# Altium PCB Digit_1.PcbDoc
Units mil, origin at the board's own origin, x right, y up, seen from the top; angles counter-clockwise.
Board outline 5400 x 5500 mil, 4 copper layers (Top Layer, Mid-Layer 1, Mid-Layer 2, Bottom Layer); 153 components, 134 nets, 1717 pads, 104 vias.
Unrouted connection lines stored in the file: 122.
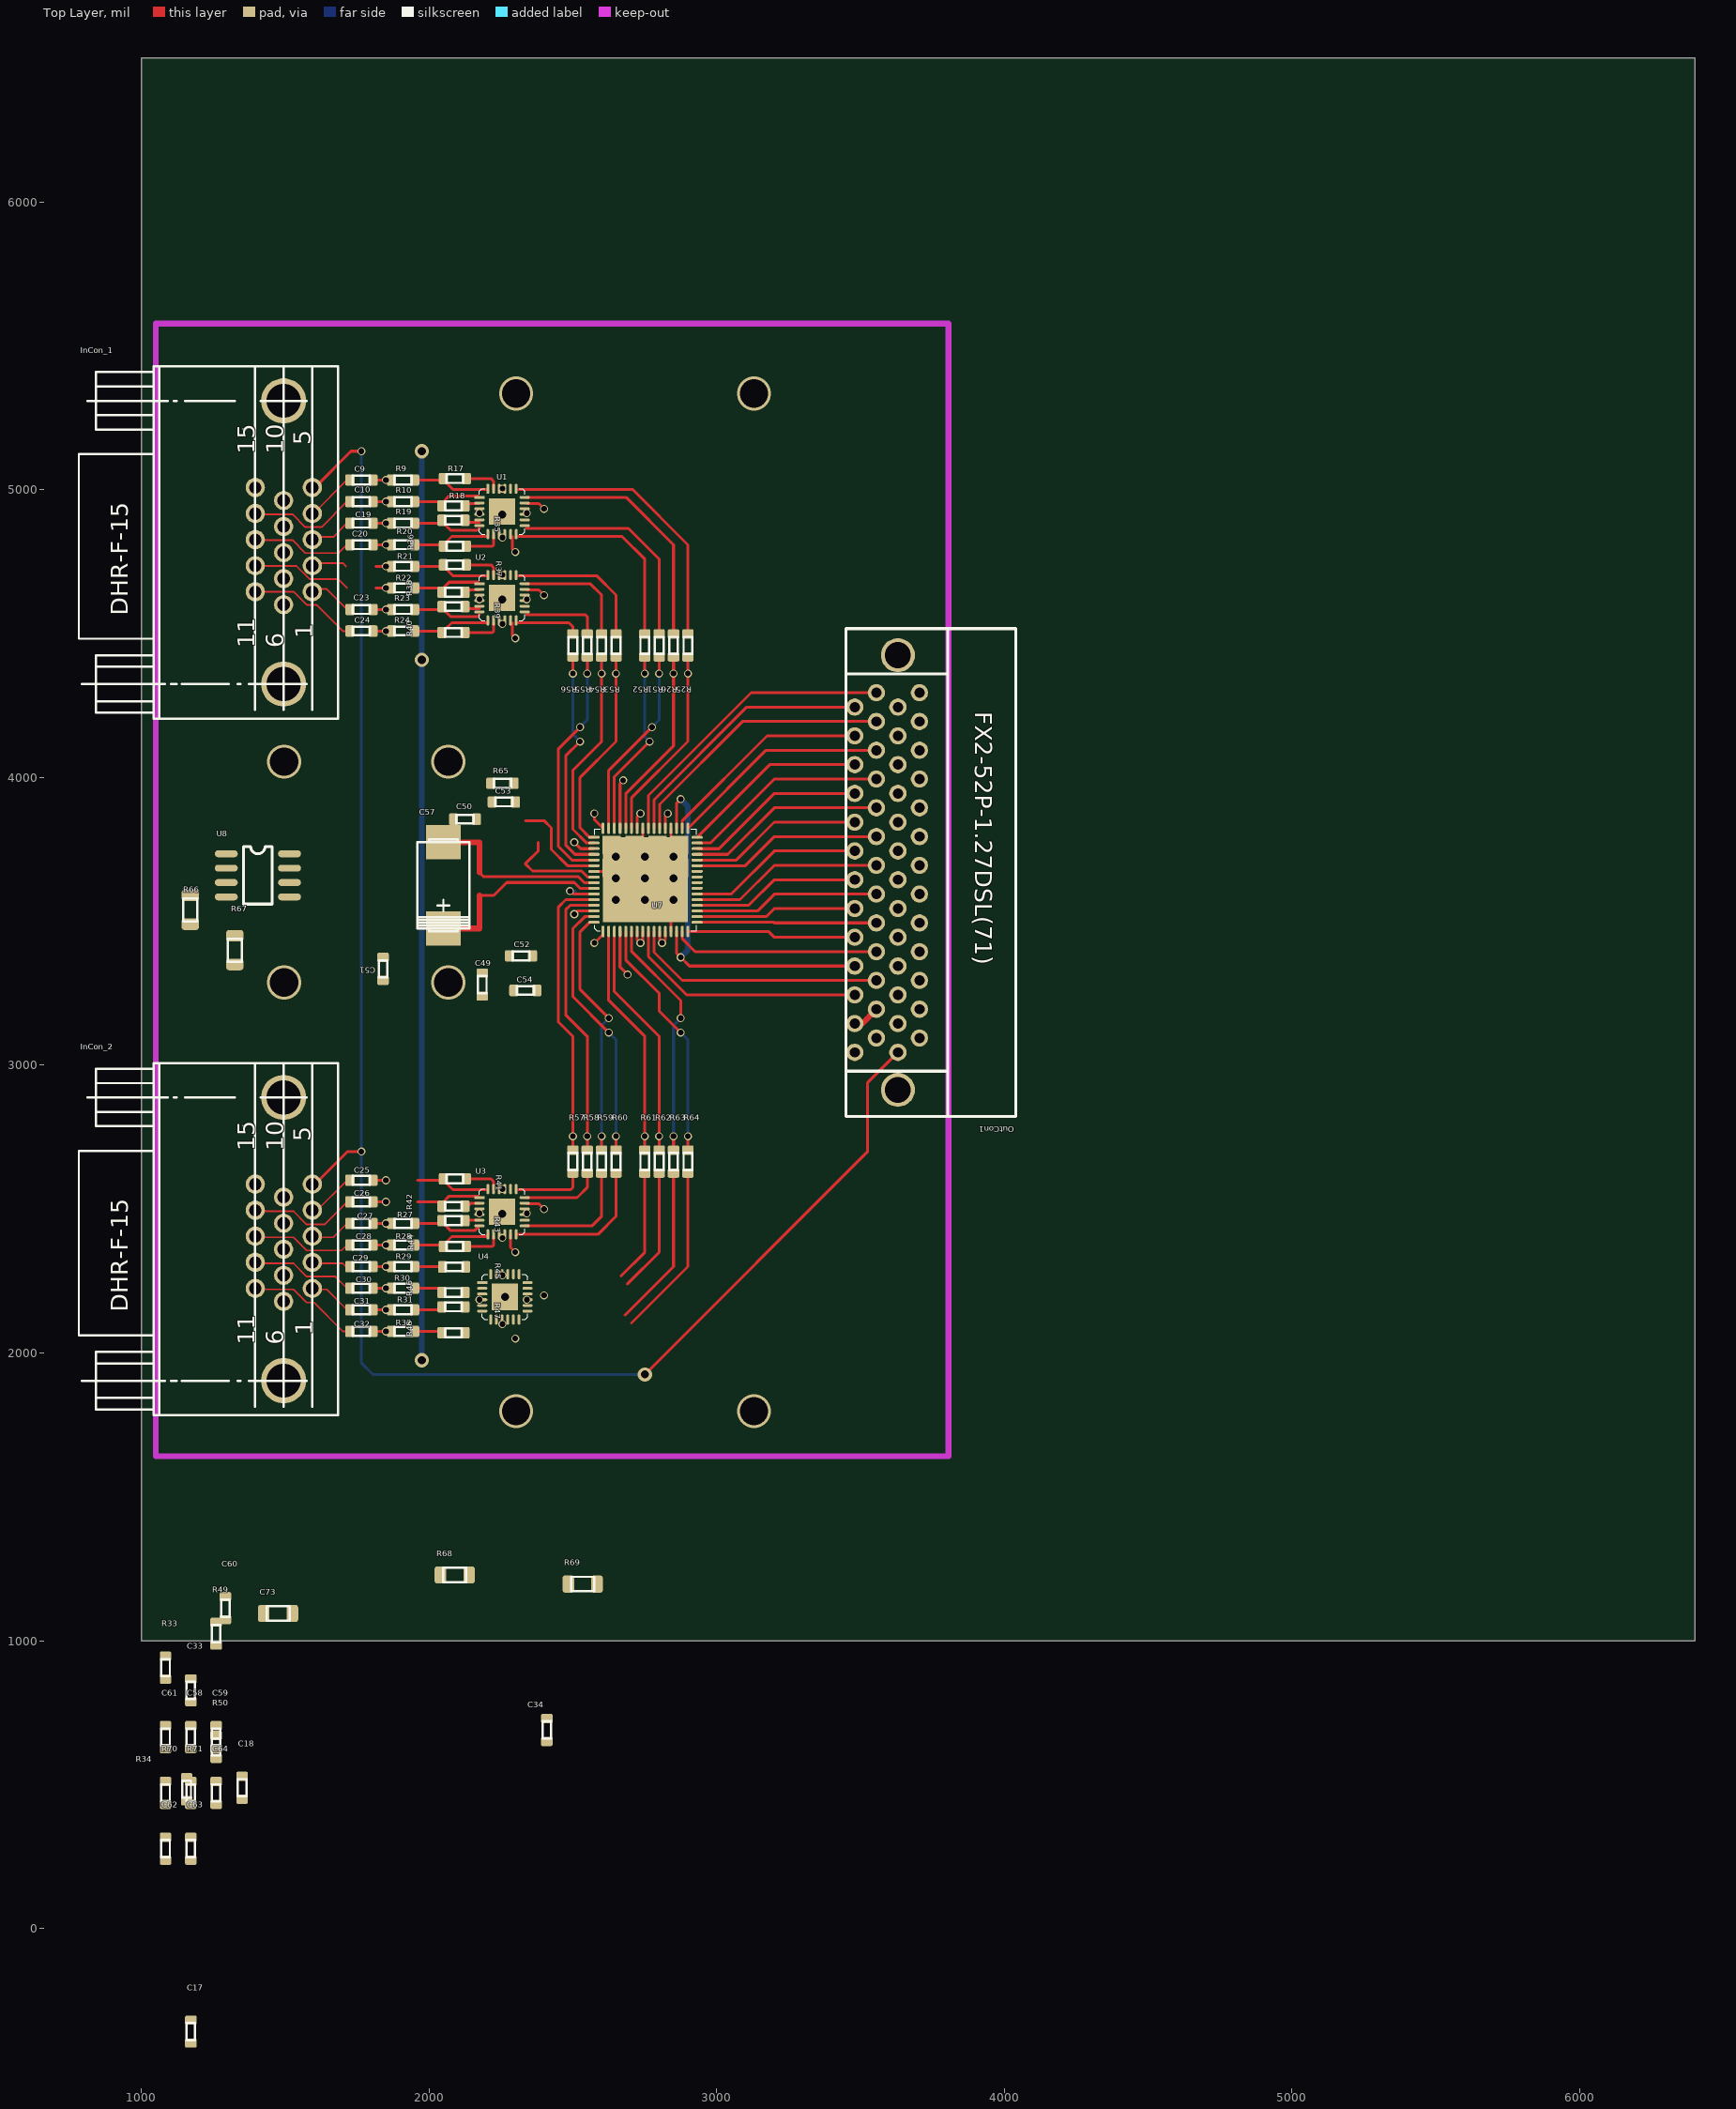
[diagram p0: Top Layer view]
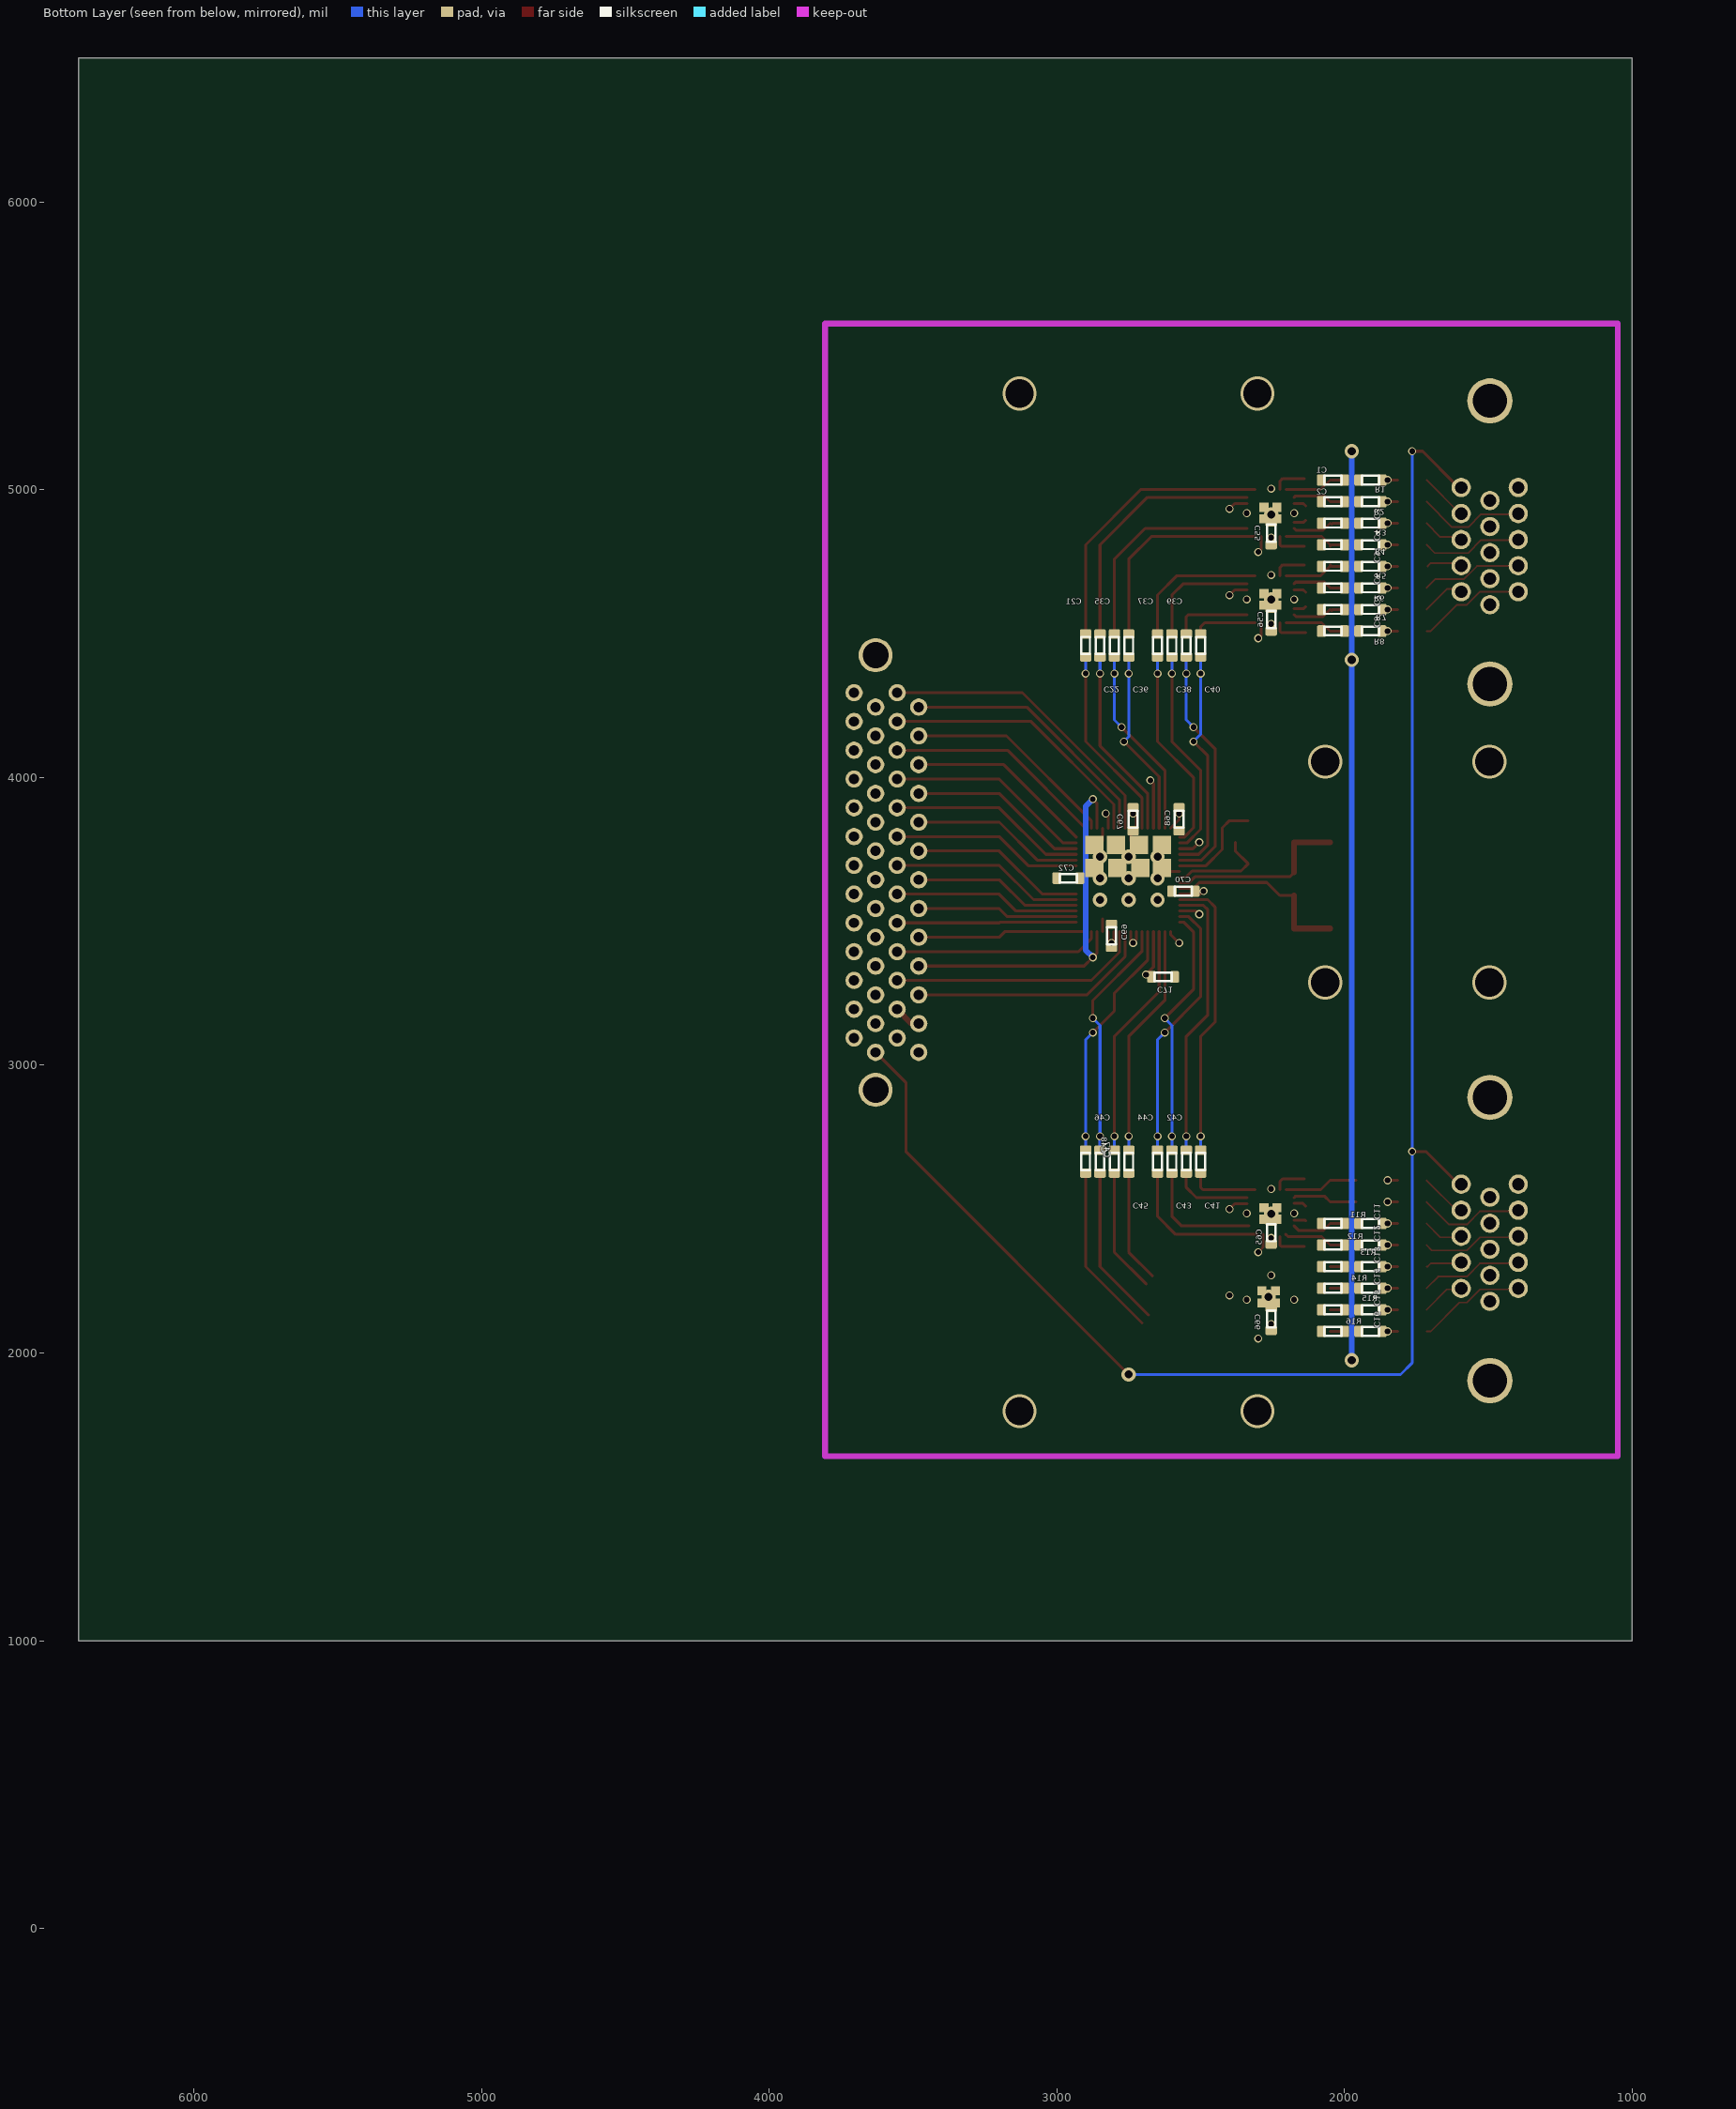
[diagram p1: Bottom Layer view, seen from below]
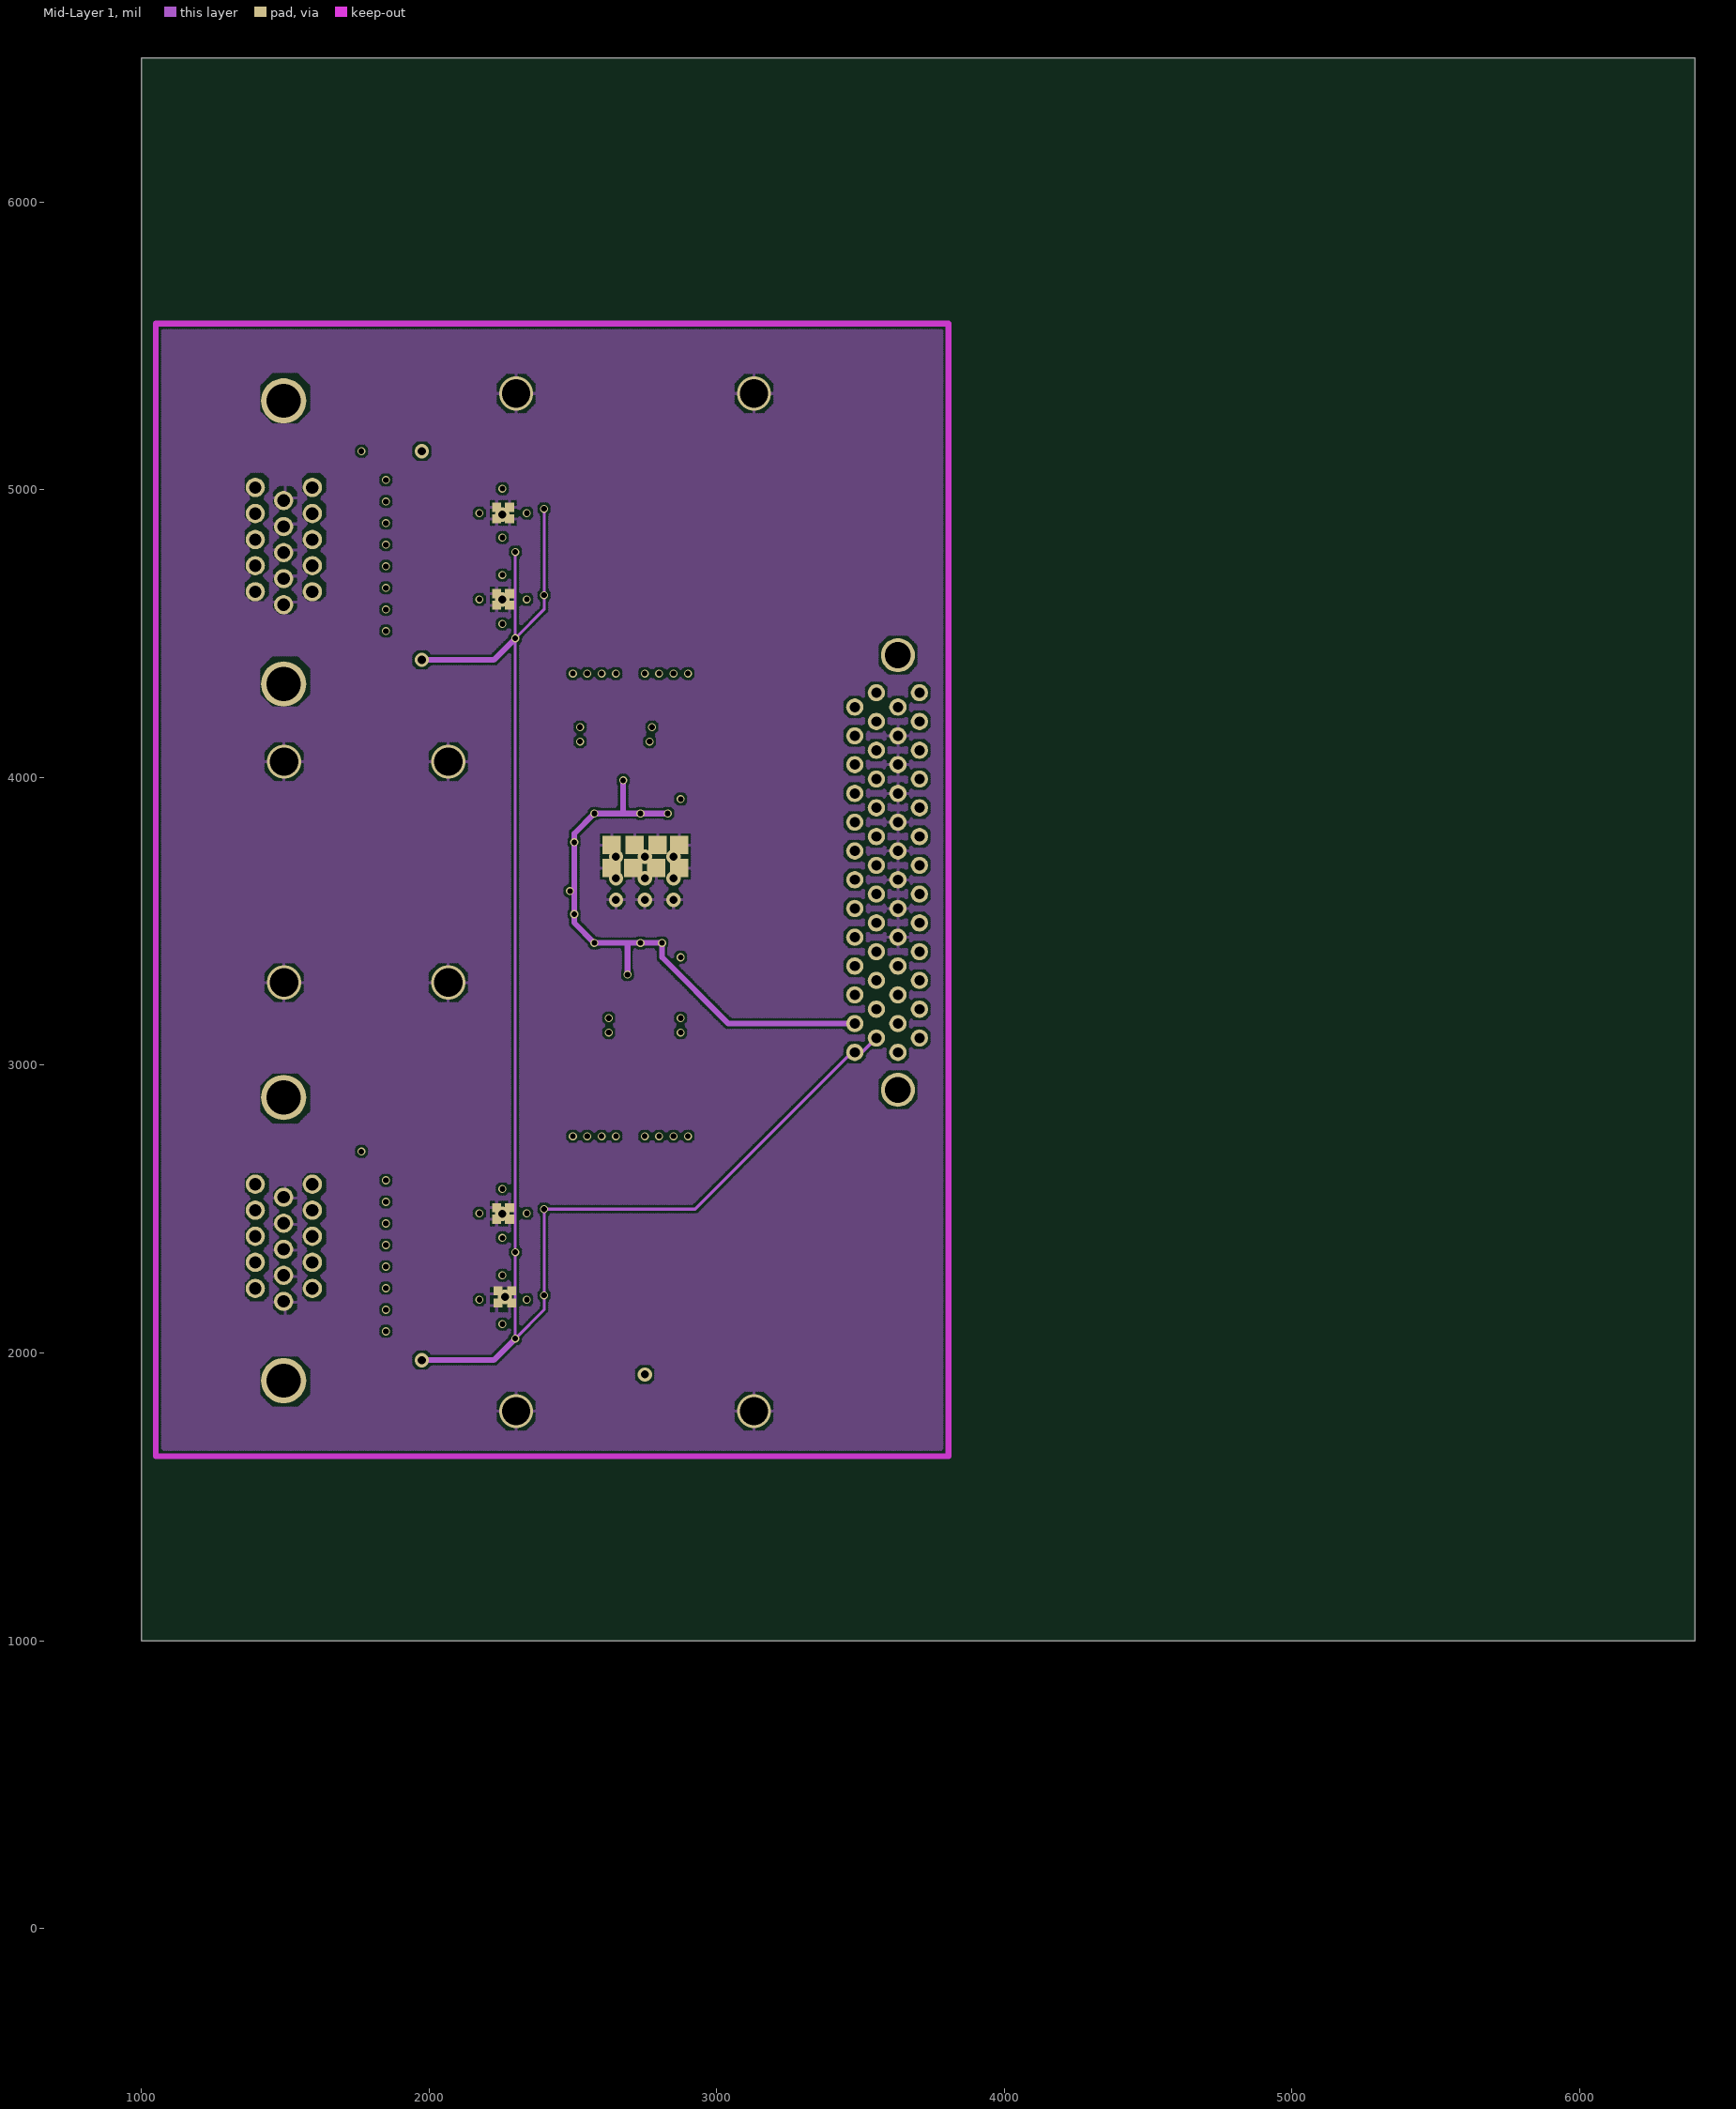
[diagram p2: Mid-Layer 1]
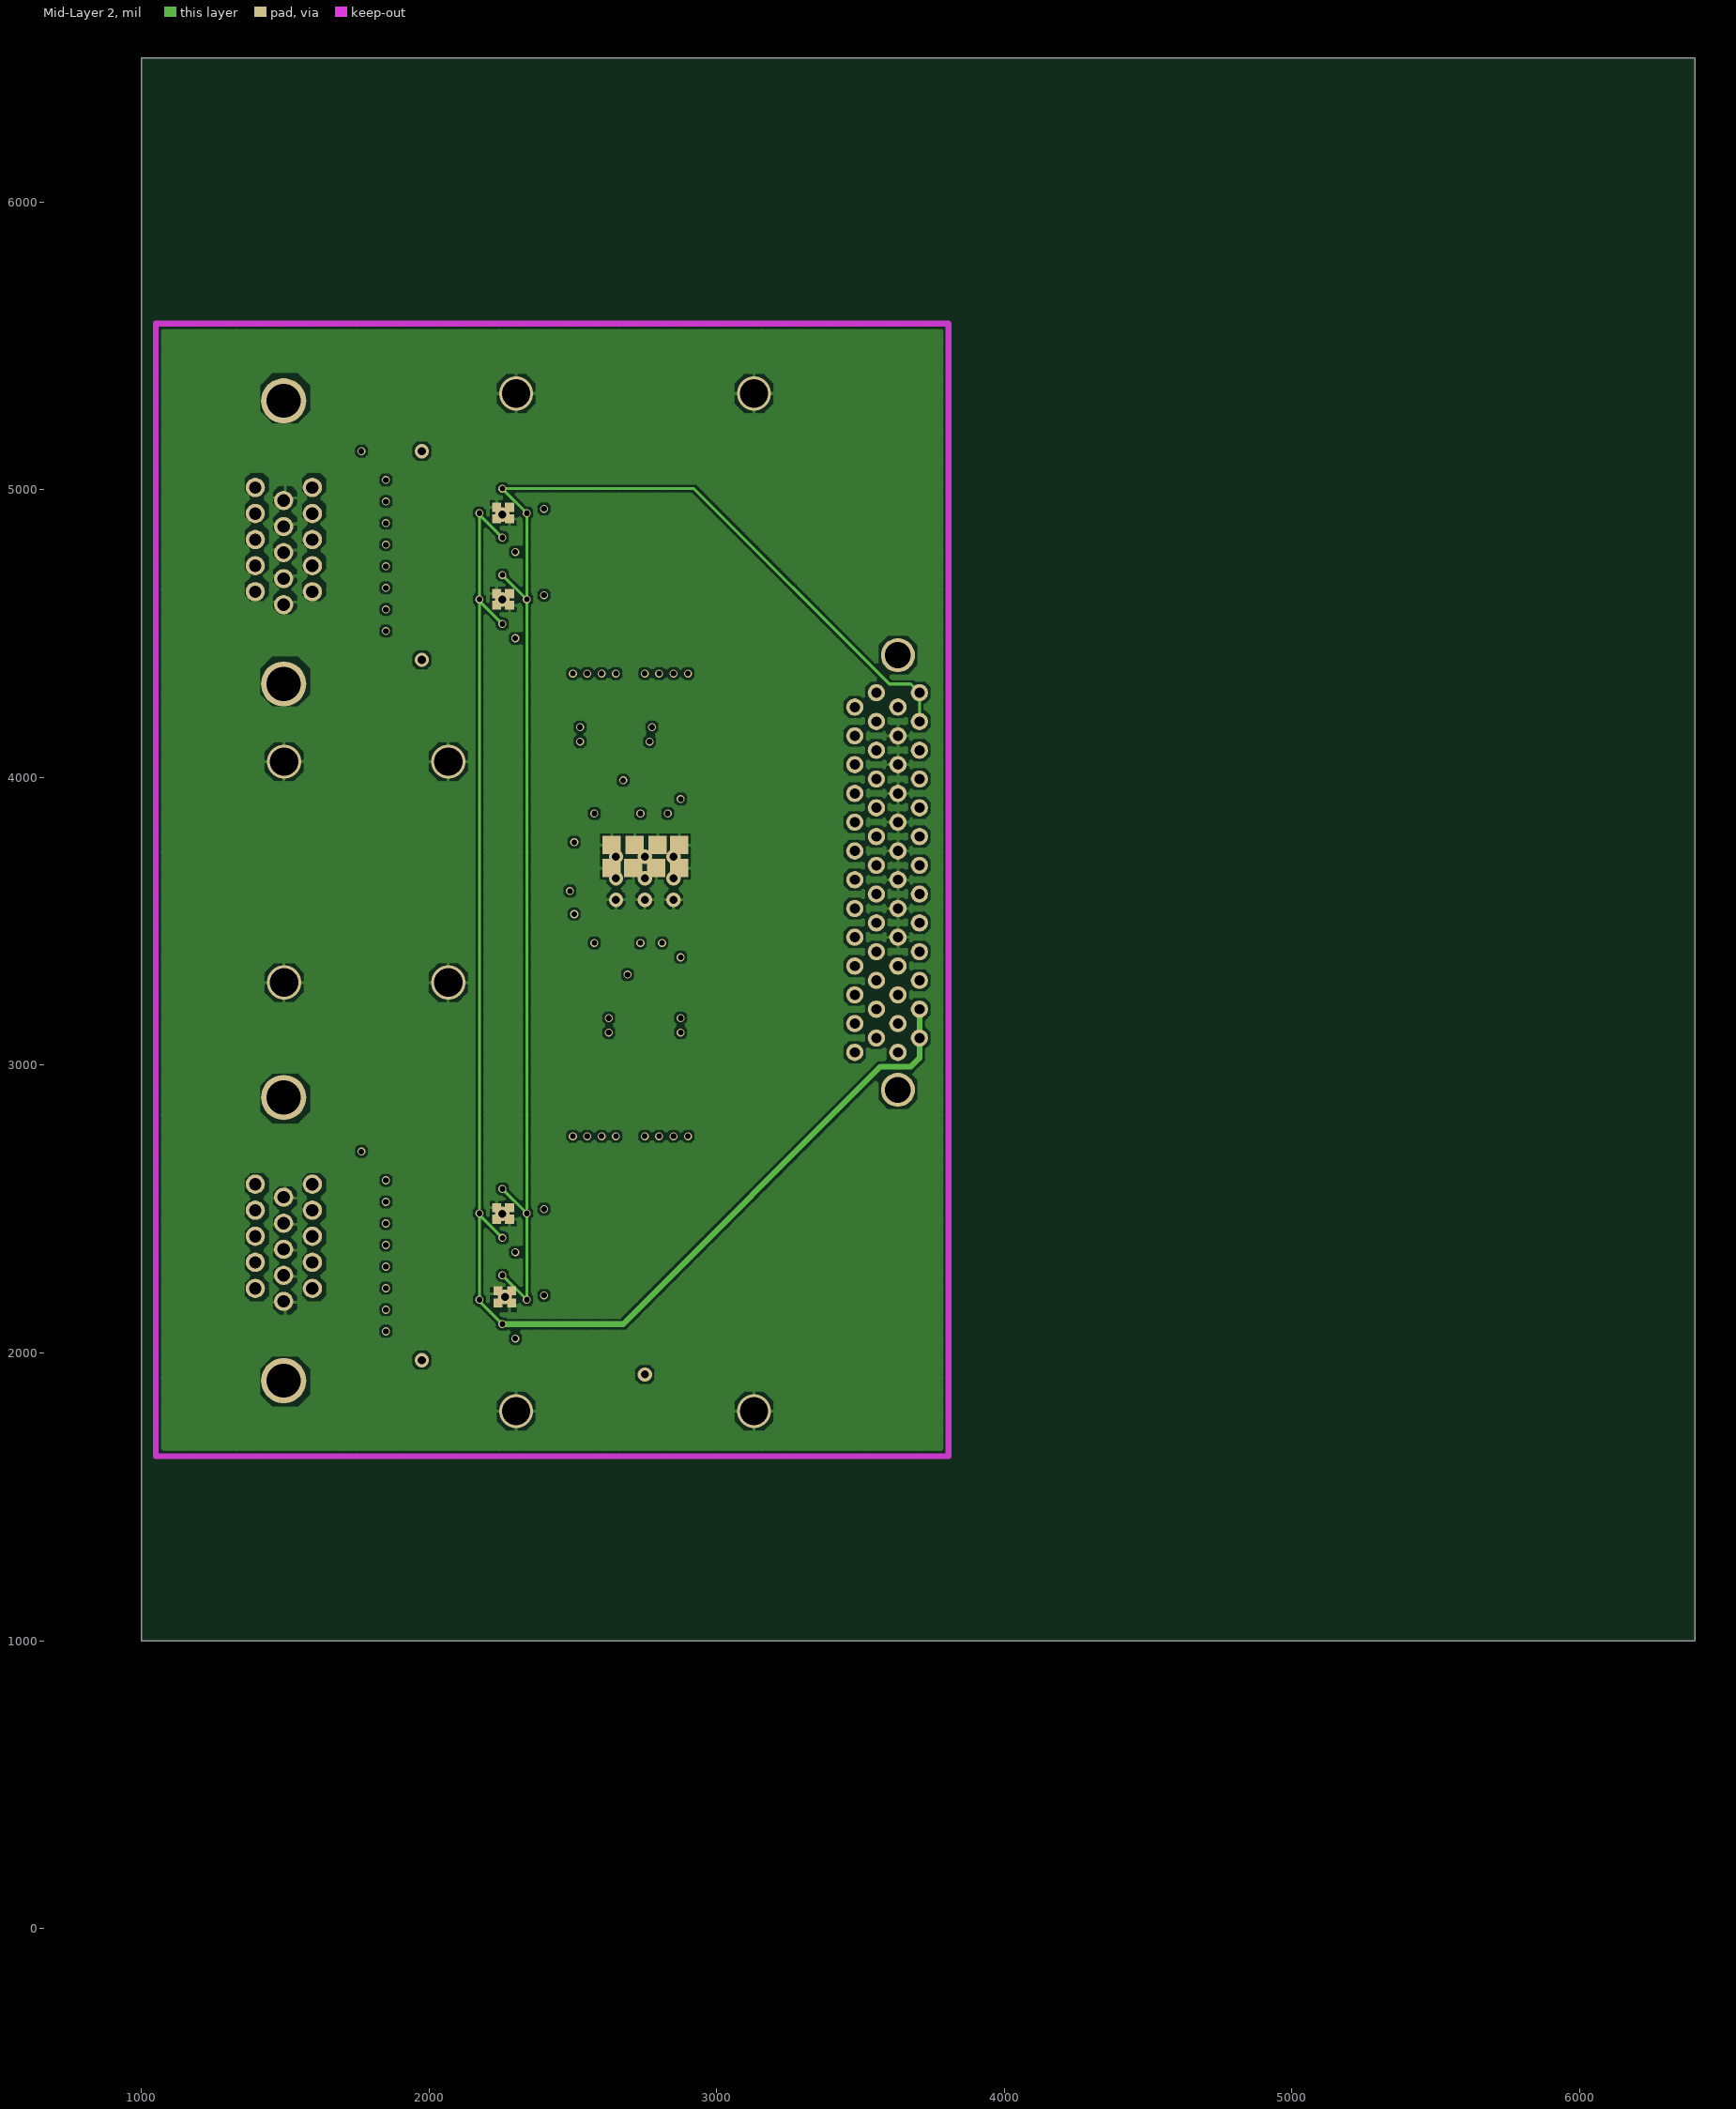
[diagram p3: Mid-Layer 2]

## Layer stack, top to bottom
Top Layer: signal copper 1.4
Dielectric: core 12.6, FR-4, Dk 4.8
Mid-Layer 1: signal copper 1.4
Dielectric: prepreg 12.6, FR-4, Dk 4.8
Mid-Layer 2: signal copper 1.4
Dielectric: core 12.6, FR-4, Dk 4.8
Bottom Layer: signal copper 1.4

## Board outline
1000,1000 1000,6500 6400,6500 6400,1000

## Design rules (kind name [scope] priority, off if disabled: settings)
Clearance [All] p1: gap=8
PolygonConnect [All] p1: connectstyle=Relief reliefconductorwidth=10 reliefentries=4 polygonreliefangle="90 Angle"
RoomDefinition Digitizer [InComponentClass('Digitizer')] p1: confinementstyle=ConfineIn formatcopy=TRUE lockcomponents=FALSE outline 1050,1050 1372.83,1050 1372.83,1246.85 1050,1246.85
RoutingVias [All] p1: holewidth=28 width=50 viastyle="Through Hole" minholewidth=28 minwidth=50 maxholewidth=28 maxwidth=50
SilkscreenOverComponentPads [All] p1: minsilkscreentomaskgap=10
SolderMaskExpansion [All] p1: expansion=4
Width [All] p1: maxlimit=40 minlimit=6 preferedwidth=8
27 further rules are at their usual default settings.

## Classes and differential pairs
component class Digitizer: C1 C2 C3 C4 C5 C6 C7 C8 C9 C10 C11 C12 C13 C14 C15 C16 C17 C18 C19 C20 C21 C22 C23 C24 C25 C26 C27 C28 C29 C30 C31 C32 C33 C34 C35 C36 C37 C38 C39 C40 C41 C42 C43 C44 C45 C46 C47 C48 C49 C50 C51 C52 C53 C54 C55 C56 C65 C66 C67 C68 C69 C70 C71 C72 C73 InCon_1 InCon_2 OutCon1 R1 R2 R3 R4 R5 R6 R7 R8 R9 R10 R11 R12 R13 R14 R15 R16 R17 R18 R19 R20 R21 R22 R23 R24 R25 R26 R27 R28 R29 R30 R31 R32 R33 R34 R35 R36 R37 R38 R39 R40 R41 R42 R43 R44 R45 R46 R47 R48 R49 R50 R51 R52 R53 R54 R55 R56 R57 R58 R59 R60 R61 R62 R63 R64 R65 R66 R67 R68 R69 U1 U2 U3 U4 U6 U7 U8

## Components (designator, comment, footprint, x,y, rotation, side; value= is the part's Value field where it differs from the comment)
C1 "10uF" chip0603 2080,5033.86 r180 bottom
C2 "0.1uF" chip0603 2080,4958.86 r180 bottom
C3 "10uF" chip0603 2080,4883.86 r180 bottom
C4 "0.1uF" chip0603 2080,4808.86 r180 bottom
C5 "10uF" chip0603 2080,4733.86 r180 bottom
C6 "0.1uF" chip0603 2080,4658.86 r180 bottom
C7 "10uF" chip0603 2080,4583.86 r180 bottom
C8 "0.1uF" chip0603 2080,4508.86 r180 bottom
C9 "1uF" chip0603 1725,5033.86 r0 top
C10 "1uF" chip0603 1725,4958.86 r0 top
C11 "1uF" chip0603 2080,2450 r180 bottom
C12 "1uF" chip0603 2080,2375 r180 bottom
C13 "1uF" chip0603 2080,2300 r180 bottom
C14 "1uF" chip0603 2080,2225 r180 bottom
C15 "1uF" chip0603 2080,2150 r180 bottom
C16 "1uF" chip0603 2080,2075 r180 bottom
C17 "1uF" chip0603 1172,-398.78 r90 top
C18 "1uF" chip0603 1350.39,448.82 r90 top
C19 "1uF" chip0603 1725,4883.86 r0 top
C20 "1uF" chip0603 1725,4808.86 r0 top
C21 "56pF" chip0603 2900,4418.86 r90 bottom
C22 "56pF" chip0603 2850,4498.86 r270 bottom
C23 "56pF" chip0603 1725,4583.86 r0 top
C24 "56pF" chip0603 1725,4508.86 r0 top
C25 "56pF" chip0603 1725,2600 r0 top
C26 "56pF" chip0603 1725,2525 r0 top
C27 "56pF" chip0603 1725,2450 r0 top
C28 "56pF" chip0603 1725,2375 r0 top
C29 "10uF" chip0603 1725,2300 r0 top
C30 "0.1uF" chip0603 1725,2225 r0 top
C31 "10uF" chip0603 1725,2150 r0 top
C32 "0.1uF" chip0603 1725,2075 r0 top
C33 "10uF" chip0603 1172,787.4 r90 top
C34 "0.1uF" chip0603 2409.45,649.61 r90 top
C35 "10uF" chip0603 2800,4418.86 r90 bottom
C36 "0.1uF" chip0603 2750,4498.86 r270 bottom
C37 "1uF" chip0603 2650,4418.86 r90 bottom
C38 "1uF" chip0603 2600,4498.86 r270 bottom
C39 "1uF" chip0603 2550,4418.86 r90 bottom
C40 "1uF" chip0603 2500,4498.86 r270 bottom
C41 "1uF" chip0603 2500,2705 r270 bottom
C42 "1uF" chip0603 2550,2625 r90 bottom
C43 "1uF" chip0603 2600,2705 r270 bottom
C44 "1uF" chip0603 2650,2625 r90 bottom
C45 "1uF" chip0603 2750,2705 r270 bottom
C46 "1uF" chip0603 2800,2625 r90 bottom
C47 "1uF" chip0603 2850,2705 r270 bottom
C48 "1uF" chip0603 2900,2625 r90 bottom
C49 "56pF" chip0603 2185,3240 r90 top
C50 "56pF" chip0603 2085,3855 r0 top
C51 "56pF" chip0603 1840,3375 r270 top
C52 "56pF" chip0603 2360,3380 r180 top
C53 "56pF" chip0603 2220,3915 r0 top
C54 "56pF" chip0603 2295,3260 r0 top
C55 "56pF" chip0603 2255,4888.86 r270 bottom
C56 "56pF" chip0603 2255,4588.86 r270 bottom
C57 "4.7uF" CEL-SMD300 2050,3475 r90 top
C58 "0.1uF" chip0603 1172,624.9 r90 top
C59 "0.1uF" chip0603 1260,624.9 r90 top
C60 "0.1uF" chip0603 1292,1072.9 r90 top
C61 "0.1uF" chip0603 1084,624.9 r90 top
C62 "1uF" chip0603 1084,237 r90 top
C63 "0.1uF" chip0603 1172,237 r90 top
C64 "0.1uF" chip0603 1260,430.95 r90 top
C65 "0.1uF" chip0603 2255,2458.15 r270 bottom
C66 "0.1uF" chip0603 2255,2158.15 r270 bottom
C67 "0.1uF" chip0603 2735,3815 r90 bottom
C68 "0.1uF" chip0603 2575,3815 r90 bottom
C69 "0.1uF" chip0603 2810,3490 r270 bottom
C70 "0.1uF" chip0603 2600,3605 r180 bottom
C71 "0.1uF" chip0603 2590.55,3307.09 r0 bottom
C72 "0.1uF" chip0603 3000,3650 r180 bottom
C73 "0.47uF" chip0805 1425.2,1094.49 r0 top
InCon_1 "DHR-15F" DHR-F-15 1494.49,4324.8 r90 top
InCon_2 "DHR-15F" DHR-F-15 1494.49,1903.54 r90 top
OutCon1 "FX2-052P-1.27DSL(71)" FX2-52P-1.27DSL(71) 3630,4425 r270 top
R1 "50" chip0603 1950,5033.86 r180 bottom
R2 "50" chip0603 1870,4958.86 r0 bottom
R3 "50" chip0603 1950,4883.86 r180 bottom
R4 "50" chip0603 1870,4808.86 r0 bottom
R5 "50" chip0603 1950,4733.86 r180 bottom
R6 "50" chip0603 1870,4658.86 r0 bottom
R7 "50" chip0603 1950,4583.86 r180 bottom
R8 "50" chip0603 1870,4508.86 r0 bottom
R9 "510" chip0603 1950,5033.86 r180 top
R10 "510" chip0603 1950,4958.86 r180 top
R11 "510" chip0603 1950,2450 r180 bottom
R12 "510" chip0603 1870,2375 r0 bottom
R13 "510" chip0603 1950,2300 r180 bottom
R14 "510" chip0603 1870,2225 r0 bottom
R15 "510" chip0603 1950,2150 r180 bottom
R16 "510" chip0603 1870,2075 r0 bottom
R17 "510" chip0603 2050,5038.86 r0 top
R18 "510" chip0603 2125,4943.86 r180 top
R19 "510" chip0603 1950,4883.86 r180 top
R20 "510" chip0603 1950,4808.86 r180 top
R21 "510" chip0603 1950,4733.86 r180 top
R22 "510" chip0603 1950,4658.86 r180 top
R23 "510" chip0603 1950,4583.86 r180 top
R24 "510" chip0603 1950,4508.86 r180 top
R25 "100" chip0603 2900,4498.86 r270 top
R26 "100" chip0603 2850,4498.86 r270 top
R27 "100" chip0603 1950,2450 r180 top
R28 "100" chip0603 1950,2375 r180 top
R29 "100" chip0603 1950,2300 r180 top
R30 "100" chip0603 1950,2225 r180 top
R31 "100" chip0603 1950,2150 r180 top
R32 "100" chip0603 1950,2075 r180 top
R33 "50" chip0603 1084,866.14 r90 top
R34 "50" chip0603 1157.48,523.62 r270 top
R35 "50" chip0603 2045,4893.86 r0 top
R36 "50" chip0603 2130,4803.86 r180 top
R37 "50" chip0603 2050,4738.86 r0 top
R38 "50" chip0603 2125,4643.86 r180 top
R39 "50" chip0603 2045,4593.86 r0 top
R40 "50" chip0603 2125,4503.86 r180 top
R41 "510" chip0603 2050,2605 r0 top
R42 "510" chip0603 2125,2510 r180 top
R43 "510" chip0603 2045,2460 r0 top
R44 "510" chip0603 2130,2370 r180 top
R45 "510" chip0603 2047.24,2299.21 r0 top
R46 "510" chip0603 2125,2210 r180 top
R47 "510" chip0603 2045,2160 r0 top
R48 "510" chip0603 2125,2070 r180 top
R49 "510" chip0603 1260,984.25 r90 top
R50 "510" chip0603 1260,590.55 r90 top
R51 "510" chip0603 2800,4498.86 r270 top
R52 "510" chip0603 2750,4498.86 r270 top
R53 "510" chip0603 2650,4498.86 r270 top
R54 "510" chip0603 2600,4498.86 r270 top
R55 "510" chip0603 2550,4498.86 r270 top
R56 "510" chip0603 2500,4498.86 r270 top
R57 "100" chip0603 2500,2625 r90 top
R58 "100" chip0603 2550,2625 r90 top
R59 "100" chip0603 2600,2625 r90 top
R60 "100" chip0603 2650,2625 r90 top
R61 "100" chip0603 2750,2625 r90 top
R62 "100" chip0603 2800,2625 r90 top
R63 "100" chip0603 2850,2625 r90 top
R64 "100" chip0603 2900,2625 r90 top
R65 "10k" chip0603 2295,3980 r180 top
R66 "3k" CHIP0805 1170,3490 r90 top
R67 "2k" CHIP0805 1325,3350 r90 top
R68 "240" CHIP0805 2039.37,1228.35 r0 top
R69 "5k6" CHIP0805 2484.25,1196.85 r0 top
R70 "R" chip0603 1084,430.95 r90 top
R71 "R" chip0603 1172,430.95 r90 top
U1 "AD4932-2" CP-24-13 2175,4973.86 r0 top
U2 "AD4932-2" CP-24-13 2175,4673.86 r0 top
U3 "AD4940-2" CP-24-13 2175,2540 r0 top
U4 "AD4940-2" CP-24-13 2185.04,2244.09 r0 top
U7 "AD9212" CP-64-6 2605,3475 r90 top
U8 "AD8602" SO-8 1295,3735 r0 top

## Footprints (in the part's own frame and the unit in brackets; to place one, negate y for a bottom-side part, rotate by r counter-clockwise, add the part's x,y. Pads: shape width x height; smd on the part's side, far side on the other; paste and mask are expansions set on the pad)
CEL-SMD300 [mil]
  rect 120x120 smd: +(0,0) -(300,0)
  silkscreen extent -10,-90 310,90
chip0603 [mil]
  oval 12x40 smd: 1(-10,0) 1(0,0) 1(10,0) 2(70,0) 2(80,0) 2(90,0)
  oval 32x12 smd: 1(0,-14) 1(0,14) 2(80,-14) 2(80,14)
  silkscreen extent 10,-15 70,15
chip0805 [mil]
  oval 20x60 smd: 1(-10,0) 1(0,0) 1(10,0) 2(90,0) 2(100,0) 2(110,0)
  oval 40x20 smd: 1(0,-20) 1(0,20) 2(100,-20) 2(100,20)
  silkscreen extent 10,-25 90,25
CHIP0805 [mil]
  oval 20x60 smd: 1(-10,0) 1(0,0) 1(10,0) 2(90,0) 2(100,0) 2(110,0)
  oval 40x20 smd: 1(0,20) 1(0,-20) 2(100,-20) 2(100,20)
  silkscreen extent 10,-25 90,25
CP-24-13 [mm]
  rect 0.9x0.25 smd: 1(0,0)
  oval 0.9x0.25 smd: 2(0,-0.5) 3(0,-1) 4(0,-1.5) 5(0,-2) 6(0,-2.5) 13(4,-2.5) 14(4,-2) 15(4,-1.5) 16(4,-1) 17(4,-0.5) 18(4,0)
  oval 0.25x0.9 smd: 7(0.75,-3.25) 8(1.25,-3.25) 9(1.75,-3.25) 10(2.25,-3.25) 11(2.75,-3.25) 12(3.25,-3.25) 19(3.25,0.75) 20(2.75,0.75) 21(2.25,0.75) 22(1.75,0.75) 23(1.25,0.75) 24(0.75,0.75)
  rect 2.34x2.34 smd: 25(2,-1.25)
  silkscreen extent 0,-3.25 4,0.75
CP-64-6 [mm]
  rect 7.5x7.5 smd: 0(4.3,-3.75)
  rect 1x0.25 smd: 1(-0.25,0)
  oval 1x0.25 smd: 2(-0.25,-0.5) 3(-0.25,-1) 4(-0.25,-1.5) 5(-0.25,-2) 6(-0.25,-2.5) 7(-0.25,-3) 8(-0.25,-3.5) 9(-0.25,-4) 10(-0.25,-4.5) 11(-0.25,-5) 12(-0.25,-5.5) 13(-0.25,-6) 14(-0.25,-6.5) 15(-0.25,-7) 16(-0.25,-7.5) 33(8.85,-7.5) 34(8.85,-7) 35(8.85,-6.5) 36(8.85,-6) 37(8.85,-5.5) 38(8.85,-5) 39(8.85,-4.5) 40(8.85,-4) 41(8.85,-3.5) 42(8.85,-3) 43(8.85,-2.5) 44(8.85,-2) 45(8.85,-1.5) 46(8.85,-1) 47(8.85,-0.5) 48(8.85,0)
  oval 0.25x1 smd: 17(0.55,-8.3) 18(1.05,-8.3) 19(1.55,-8.3) 20(2.05,-8.3) 21(2.55,-8.3) 22(3.05,-8.3) 23(3.55,-8.3) 24(4.05,-8.3) 25(4.55,-8.3) 26(5.05,-8.3) 27(5.55,-8.3) 28(6.05,-8.3) 29(6.55,-8.3) 30(7.05,-8.3) 31(7.55,-8.3) 32(8.05,-8.3) 49(8.05,0.8) 50(7.55,0.8) 51(7.05,0.8) 52(6.55,0.8) 53(6.05,0.8) 54(5.55,0.8) 55(5.05,0.8) 56(4.55,0.8) 57(4.05,0.8) 58(3.55,0.8) 59(3.05,0.8) 60(2.55,0.8) 61(2.05,0.8) 62(1.55,0.8) 63(1.05,0.8) 64(0.55,0.8)
  silkscreen extent -0.2,-8.25 8.8,0.75
DHR-F-15 [mm]
  round 1.7 hole 1.1: 1(8.15,-2.54) 2(10.45,-2.54) 3(12.75,-2.54) 4(15.05,-2.54) 5(17.35,-2.54) 6(7,0) 7(9.3,0) 8(11.6,0) 9(13.9,0) 10(16.2,0) 11(8.15,2.5) 12(10.45,2.5) 13(12.75,2.5) 14(15.05,2.5) 15(17.35,2.5)
  round 4 hole 3: 16(0,0) 17(25,0)
  silkscreen extent -3.05,-4.83 28.05,18.08
FX2-52P-1.27DSL(71) [mm]
  round 3 hole 2.3: 27(0,0) 28(38.37,0)
  round 1.524 hole 0.9: A1(3.31,-1.905) A2(4.58,-3.81) A3(5.85,-1.905) A4(7.12,-3.81) A5(8.39,-1.905) A6(9.66,-3.81) A7(10.93,-1.905) A8(12.2,-3.81) A9(13.47,-1.905) A10(14.74,-3.81) A11(16.01,-1.905) A12(17.28,-3.81) A13(18.55,-1.905) A14(19.82,-3.81) A15(21.09,-1.905) A16(22.36,-3.81) A17(23.63,-1.905) A18(24.9,-3.81) A19(26.17,-1.905) A20(27.44,-3.81) A21(28.71,-1.905) A22(29.98,-3.81) A23(31.25,-1.905) A24(32.52,-3.81) A25(33.79,-1.905) A26(35.06,-3.81) B1(3.31,1.905) B2(4.58,0) B3(5.85,1.905) B4(7.12,0) B5(8.39,1.905) B6(9.66,0) B7(10.93,1.905) B8(12.2,0) B9(13.47,1.905) B10(14.74,0) B11(16.01,1.905) B12(17.28,0) B13(18.55,1.905) B14(19.82,0) B15(21.09,1.905) B16(22.36,0) B17(23.63,1.905) B18(24.9,0) B19(26.17,1.905) B20(27.44,0) B21(28.71,1.905) B22(29.98,0) B23(31.25,1.905) B24(32.52,0) B25(33.79,1.905) B26(35.06,0)
  silkscreen extent -2.35,-4.59 40.72,10.41
SO-8 [mil]
  oval 80x24 smd: 1(0,0) 2(0,-50) 3(0,-100) 4(0,-150) 5(220,-150) 6(220,-100) 7(220,-50) 8(220,0)
  silkscreen extent 60,-175 160,25

## Part data
C1 C2 C3 C4 C5 C6 C7 C8 C9 C10 C11 C12 C13 C14 C15 C16 C17 C18 C19 C20 C21 C22 C23 C24 C25 C26 C27 C28 C29 C30 C31 C32 C33 C34 C35 C36 C37 C38 C39 C40 C41 C42 C43 C44 C45 C46 C47 C48 C49 C50 C51 C52 C53 C54 C55 C56 C58 C59 C60 C61 C62 C63 C64 C65 C66 C67 C68 C69 C70 C71 C72 C73: library part C
C57: library part "C POL"
R1 R2 R3 R4 R5 R6 R7 R8 R9 R10 R11 R12 R13 R14 R15 R16 R17 R18 R19 R20 R21 R22 R23 R24 R25 R26 R27 R28 R29 R30 R31 R32 R33 R34 R35 R36 R37 R38 R39 R40 R41 R42 R43 R44 R45 R46 R47 R48 R49 R50 R51 R52 R53 R54 R55 R56 R57 R58 R59 R60 R61 R62 R63 R64 R65 R66 R67 R68 R69: library part R
U3 U4: library part AD4932-2

## Free pads (board coordinates)
  rect 32x32 all layers, no hole: 0(2235,2465) 0(2235,2505) 0(2235,4598.86) 0(2235,4638.86) 0(2235,4898.86) 0(2235,4938.86) 0(2280,2465) 0(2280,2505) 0(2280,4598.86) 0(2280,4638.86) 0(2280,4898.86) 0(2280,4938.86)
  rect 31.5x31.5 all layers, no hole: 0(2240.16,2173.23) 0(2240.16,2216.54) 0(2287.4,2173.23) 0(2287.4,2216.54)
  rect 64x64 all layers, no hole: 0(2635,3685) 0(2635,3765) 0(2710,3685) 0(2715,3765) 0(2790,3685) 0(2795,3765) 0(2870,3685) 0(2870,3765)

## Via types
v1: diameter 28, hole 20, Top Layer to Bottom Layer, 79 vias
v2: diameter 50, hole 28, Top Layer to Bottom Layer, 17 vias
v3: diameter 118.11, hole 98.43, Top Layer to Bottom Layer, 8 vias

## Nets (pads, with @x,y where several pads share a name; then routed paths per layer and width w, separated by ;. In a path a pad name is that pad's centre, name@x,y a point inside that pad or via, vN(x,y) a via of type N, cw(c..) or ccw(c..) an arc to the next point about the centre after c; other vN are vias at no path point)
"+1.8 V": C67.2 C68.2 C69.2 C70.2 C71.2 OutCon1.A23 OutCon1.A24 U7.1 U7.4 U7.7 U7.8 U7.11 U7.12 U7.37 U7.42 U7.45 U7.48 U7.51 U7.59 U7.62 | length 3129.7
  Top Layer w10: v1(2490,3605) 2499.92,3595.08 U7.59 ; v1(2505,3525) 2516.02,3536.02 U7.62 ; v1(2505,3775) 2527.44,3752.56 U7.51 ; v1(2575,3425) 2605,3455 U7.1 ; v1(2575,3875) 2575,3853.42 U7.48 ; U7.4 2664.05,3340.95 v1(2690,3315) ; U7.45 2664.05,3979.05 v1(2675,3990) ; U7.7 2723.11,3436.89 v1(2735,3425) 2742.8,3432.8 U7.8 ; U7.42 2723.11,3863.11 v1(2735,3875) ; U7.11 2801.85,3433.15 v1(2810,3425) 2821.53,3436.53 U7.12 ; U7.37 2821.53,3866.53 v1(2830,3875)
  Top Layer w20: OutCon1.A24 3505,3144.68 OutCon1.A23
  Mid-Layer 1 w20: v1(2675,3990) 2675,3875 ; v1(2690,3315) 2690,3425 ; v1@2810,3420 2810,3410 2810,3400 2810,3375 3040.32,3144.68 OutCon1.A24 ; v1(2810,3425) v1(2735,3425) 2690,3425 ; v1(2830,3875) v1(2735,3875) 2675,3875 ; 2675,3875 v1(2575,3875) 2505,3805 v1(2505,3775) v1(2505,3525) 2505,3495 v1(2575,3425) 2690,3425
  Bottom Layer w10: v1(2490,3605) C70.2@2510,3605
  Bottom Layer w20: C69.2@2810,3420 v1(2810,3425)
"+1.8 VDIG": C72.2 OutCon1.A20 U7.14 U7.35 | length 1391.7
  Top Layer w10: U7.14 2860.91,3389.09 v1(2875,3375) 2905.32,3344.68 OutCon1.A20 ; U7.35 2860.91,3910.91 v1(2875,3925)
  Bottom Layer w20: v1(2875,3375) 2900,3400 2900,3900 v1(2875,3925)
"+5 V": C61.2 C63.2 C65.2 C66.2 OutCon1.B23 OutCon1.B25 R66.1 U1.3 U1.4 U1.9 U1.10 U2.3 U2.4 U2.9 U2.10 U3.3 U3.4 U3.9 U3.10 U4.3 U4.4 U4.9 U4.10 U8.8 | length 5353.5
  Mid-Layer 2 w10: v1(2175,2485) v1@2175,2480 ; 2175,2501.85 2175,4785 ; v1(2255,2100) 2175,2180 v1(2175,2185) v1@2175,2480 ; v1(2255,2400) v1@2175,2480 ; v1(2255,4533.86) 2175,4613.86 v1(2175,4618.86) v1(2175,4918.86) 2175,4913.86 v1(2255,4833.86)
  Mid-Layer 2 w20: v1(2255,2100) 2675,2100 3570,2995 3675,2995 3705,3025 OutCon1.B23
"-5 V": OutCon1.B1 OutCon1.B3 | length 5041.6
  Mid-Layer 2 w10: v1(2255,2270) v1(2340,2185) v1(2340,2485) v1(2255,2570) ; v1(2255,4703.86) v1(2340,4618.86) ; 2340,2501.85 v1(2340,4918.86) v1(2255,5003.86) 2921.14,5003.86 3600,4325 3674.68,4325 OutCon1.B1 OutCon1.B3
AGND: U7.0
CALIB: InCon_1.5 InCon_2.5 OutCon1.B26 R70.1 R71.1 | length 6069.4
  Top Layer w10: InCon_2.5@1600,2583.07 1716.45,2699.52 v1@1765,2699.52 ; InCon_1.5@1611.93,5016.93 1728.86,5133.86 v1(1765,5133.86) ; v2(2750,1925) 3525,2700 3525,2939.68 OutCon1.B26
  Bottom Layer w10: v1(1765,5133.86) v1(1765,2700) 1765,1965 1805,1925 v2(2750,1925)
CLK+: OutCon1.A21 U7.10 | length 885.8
  Top Layer w10: U7.10 2782.16,3392.84 2880.32,3294.68 OutCon1.A21
CLK-: OutCon1.A22 U7.9 | length 860.2
  Top Layer w10: U7.9 2762.48,3377.52 2895.32,3244.68 OutCon1.A22
CSB: OutCon1.A1 U7.40 | length 1054.5
  Top Layer w10: U7.40 2762.48,3937.48 3119.68,4294.69 OutCon1.A1
GND: C1.1 C2.1 C3.1 C4.1 C5.1 C6.1 C7.1 C8.1 C21.2 C22.1 C23.2 C24.1 C25.2 C26.1 C27.2 C28.1 C29.1 C30.1 C31.1 C32.1 C33.1 C34.1 C35.1 C36.1 C49.2 C50.1 C51.2 C52.1 C53.2 C54.1 C55.2 C56.1 C58.2 C60.1 C61.1 C62.1 C63.1 C64.1 C65.1 C66.1 C67.1 C68.1 C69.1 C70.1 C71.1 C72.1 InCon_1.6 InCon_1.7 InCon_1.8 InCon_1.9 InCon_1.10 InCon_2.6 InCon_2.7 InCon_2.8 InCon_2.9 InCon_2.10 OutCon1.B4 OutCon1.B6 OutCon1.B8 OutCon1.B10 OutCon1.B12 OutCon1.B14 OutCon1.B16 OutCon1.B18 pad.0 R65.2 R67.2 R70.2 R71.2 U1.15 U1.16 U1.21 U1.22 U1.25 U2.15 U2.16 U2.21 U2.22 U2.25 U3.15 U3.16 U3.21 U3.22 U3.25 U4.15 U4.16 U4.21 U4.22 U4.25 U7.13 U7.36 U7.41 U7.55 U8.4 | length 220.6
  Top Layer w10: C25.2@1815,2600 v1@1860,2600 ; U7.55 pad.0@2617.4,3673.82 ; pad.0@2742.8,3779.53 U7.41 ; U7.13 2841.22,3509.05 ; pad.0@2841.22,3779.53 U7.36
  other v1: 1850,2600
  other v2: 2263.78,2194.88 2255,2483.15 2650,3575 2750,3575 2850,3575 2650,3650 2750,3650 2850,3650 2650,3725 2750,3725 2850,3725 2255,4618.86 2255,4913.86
  other v3: 2303.15,1797.24 3129.92,1797.24 1496.06,3287.4 2066.93,3287.4 1496.06,4055.12 2066.93,4055.12 2303.15,5334.65 3129.92,5334.65
INPUT_CH1+: C9.1 InCon_1.4 | length 167.6
  Top Layer w6: InCon_1.4@1596.48,4915.33 C9.1@1715,5033.86
INPUT_CH1-: C10.1 InCon_1.14 | length 373.6
  Top Layer w6: InCon_1.14@1401.57,4926.38 1412.95,4915 1525,4915 1570,4870 1626.14,4870 C10.1@1715,4958.86
INPUT_CH2+: C11.1 InCon_1.3 | length 134.9
  Top Layer w6: InCon_1.3@1600,4835.83 1666.97,4835.83 1715,4883.86
INPUT_CH2-: C12.1 InCon_1.13 | length 348.5
  Top Layer w6: InCon_1.13@1401.57,4835.83 1412.4,4825 1525,4825 1570,4780 1686.14,4780 1715,4808.86
INPUT_CH3+: C13.1 InCon_1.2 | length 115.7
  Top Layer w6: InCon_1.2@1600,4745.28 1699.58,4745.28 1711,4733.86
INPUT_CH3-: C14.1 InCon_1.12 | length 349.2
  Top Layer w6: InCon_1.12@1401.57,4745.28 1411.85,4735 1539.41,4735 1584.41,4690 1683.86,4690 1715,4658.86
INPUT_CH4+: C15.1 InCon_1.1 | length 144.4
  Top Layer w6: InCon_1.1@1600,4654.72 1644.13,4654.72 1715,4583.86
INPUT_CH4-: C16.1 InCon_1.11 | length 373.8
  Top Layer w6: InCon_1.11@1401.57,4654.72 1411.3,4645 1530,4645 1575,4600 1608.86,4600 1700,4508.86 1715,4508.86
INPUT_CH5+: C37.1 InCon_2.4 | length 159.5
  Top Layer w6: InCon_2.4@1600,2492.52 1607.52,2492.52 1715,2600
INPUT_CH5-: C38.1 InCon_2.14 | length 364.9
  Top Layer w6: InCon_2.14@1401.57,2492.52 1529.13,2492.52 1575,2446.65 1636.65,2446.65 1715,2525
INPUT_CH6+: C39.1 InCon_2.3 | length 134.9
  Top Layer w6: InCon_2.3@1600,2401.97 1666.97,2401.97 1715,2450
INPUT_CH6-: C40.1 InCon_2.13 | length 340.3
  Top Layer w6: InCon_2.13@1401.57,2401.97 1529.13,2401.97 1575,2356.1 1696.1,2356.1 1715,2375
INPUT_CH7+: C41.1 InCon_2.2 | length 119.7
  Top Layer w6: InCon_2.2@1600,2311.42 1699.58,2311.42 1711,2300 1715,2300
INPUT_CH7-: C42.1 InCon_2.12 | length 349.2
  Top Layer w6: InCon_2.12@1401.57,2311.42 1529.13,2311.42 1575,2265.55 1674.45,2265.55 1715,2225
INPUT_CH8+: C43.1 InCon_2.1 | length 144.4
  Top Layer w6: InCon_2.1@1600,2220.87 1644.13,2220.87 1715,2150
INPUT_CH8-: C44.1 InCon_2.11 | length 373.8
  Top Layer w6: InCon_2.11@1401.57,2220.87 1529.13,2220.87 1575,2175 1600,2175 1700,2075 1715,2075
NetC10_2: C10.2 R2.1 R10.2 | length 45
  Top Layer w10: C10.2@1815,4958.86 R10.2@1860,4958.86
  other v1: 1850,4958.86
NetC12_2: C12.2 R4.1 R12.2
NetC14_2: C14.2 R6.1 R14.2
NetC16_2: C16.2 R8.1 R16.2
NetC17_2: C17.2 R1.1
NetC18_2: C18.2 R3.1
NetC19_2: C19.2 R5.1 | length 45
  Top Layer w10: C19.2@1815,4883.86 v1@1860,4883.86
  other v1: 1850,4883.86
NetC20_2: C20.2 R7.1 | length 45
  Top Layer w10: C20.2@1815,4808.86 v1@1860,4808.86
  other v1: 1850,4808.86
NetC38_2: C38.2 R34.1 R42.2
NetC40_2: C40.2 R36.1 R44.2
NetC42_2: C42.2 R38.1 R46.2
NetC44_2: C44.2 R40.1 R48.2
NetC45_2: C45.2 R33.1
NetC46_2: C46.2 R35.1
NetC47_2: C47.2 R37.1
NetC48_2: C48.2 R39.1
NetC57_+: C57.+ C59.1 C60.2 U7.58
NetC57_-: C57.- C58.1 C59.2 U7.57
NetC62_2: C62.2 C64.2 U7.56
NetC73_1: C73.1 R68.1 U8.1
NetC73_2: C73.2 R69.1 U8.2
NetR9_1: R9.1 R17.1 U1.24 | length 251
  Top Layer w10: R9.1@1960,5033.86 R17.1@2045,5033.86 ; R17.1@2050,5033.86 2082.44,5001.42 U1.24@2202.56,5001.42
NetR10_1: R10.1 R18.2 U1.1 | length 225.4
  Top Layer w10: R10.1@1960,4958.86 2050,4958.86 2070,4978.86 2170,4978.86 U1.1
NetR11_1: R11.1 R19.1 U1.6
NetR12_1: R12.1 R20.2 U1.7
NetR13_1: R13.1 R21.1 U2.24
NetR14_1: R14.1 R22.2 U2.1
NetR15_1: R15.1 R23.1 U2.6
NetR16_1: R16.1 R24.2 U2.7
NetR17_2: R17.2 U1.23 | length 116.3
  Top Layer w10: R17.2@2140,5038.86 2215,5038.86 2224.21,5029.65 U1.23@2224.21,5001.42
NetR18_1: R18.1 U1.2 | length 43.5
  Top Layer w10: R18.1@2135,4943.86 2143.35,4952.2 U1.2@2175,4952.2
NetR19_2: R19.2 U1.5
NetR20_1: R20.1 U1.8 | length 256.7
  Top Layer w10: R20.1@1960,4808.86 2045,4808.86 2050,4803.86 ; 2050,4808.86 2079.17,4838.03 2202.56,4838.03
NetR21_2: R21.2 U2.23
NetR22_1: R22.1 U2.2 | length 220.8
  Top Layer w10: R22.1@1960,4658.86 2044,4658.86 2045,4657.86 ; 2050,4658.86 2070,4678.86 2170,4678.86 2175,4673.86
NetR23_2: R23.2 U2.5
NetR24_1: R24.1 U2.8 | length 247.6
  Top Layer w10: R24.1@1960,4508.86 2050,4508.86 ; 2055,4513.86 2079.17,4538.03 2202.56,4538.03
NetR25_1: R25.1 U1.19 | length 968.9
  Top Layer w10: 2310.83,5001.42 2707.44,5001.42 2900,4808.86 R25.1@2900,4508.86
NetR26_1: R26.1 U1.18 | length 880
  Top Layer w10: U1.18@2338.39,4973.86 2685,4973.86 2850,4808.86 R26.1@2850,4508.86
NetR27_1: R27.1 U1.13 | length 232.2
  Top Layer w10: R27.1@1960,2450 2050,2450 2075,2425 2158.43,2425 2175,2441.58
NetR28_1: R28.1 U1.12 | length 259.9
  Top Layer w10: R28.1@1960,2375 2050,2375 2079.17,2404.17 2196.65,2404.17 2204.53,2412.05
NetR29_1: R29.1 U2.19 | length 90
  Top Layer w10: R29.1@1960,2300 2050,2300
NetR30_1: R30.1 U2.18 | length 90
  Top Layer w10: R30.1@1960,2225 2050,2225
NetR31_1: R31.1 U2.13 | length 90
  Top Layer w10: R31.1@1960,2150 2050,2150
NetR32_1: R32.1 U2.12 | length 90
  Top Layer w10: R32.1@1960,2075 2050,2075
NetR41_1: R41.1 R49.1 U3.24 | length 256
  Top Layer w10: 1960,2600 2050,2600 2082.44,2567.56 U3.24@2202.56,2567.56
NetR42_1: R42.1 R50.2 U3.1 | length 44.3
  Top Layer w10: R42.1@2135,2510 2145.32,2520.32 2175,2520.32
NetR43_1: R43.1 R51.1 U3.6
NetR44_1: R44.1 R52.2 U3.7 | length 115.9
  Top Layer w10: R44.1@2140,2370 2220,2370 2224.21,2374.21 2224.21,2404.17
NetR45_1: R45.1 R53.1 U4.24
NetR46_1: R46.1 R54.2 U4.1
NetR47_1: R47.1 R55.1 U4.6
NetR48_1: R48.1 R56.2 U4.7
NetR49_2: R49.2 U3.23
NetR50_1: R50.1 U3.2
NetR51_2: R51.2 U3.5
NetR52_1: R52.1 U3.8 | length 722
  Top Layer w10: 2310.83,4838.03 2670.83,4838.03 2750,4758.86 R52.1@2750,4508.86
NetR53_2: R53.2 U4.23
NetR54_1: R54.1 U4.2 | length 403.2
  Top Layer w10: 2338.39,4673.86 2560,4673.86 2600,4633.86 R54.1@2600,4508.86
NetR55_2: R55.2 U4.5
NetR56_1: R56.1 U4.8 | length 210
  Top Layer w10: 2310.83,4538.03 2485.83,4538.03 2500,4523.86 R56.1@2500,4508.86
NetR57_1: R57.1 U3.19 | length 242.3
  Top Layer w10: 2310.83,2567.56 2492.56,2567.56 2500,2575 R57.1@2500,2625
NetR58_1: R58.1 U3.18 | length 276.1
  Top Layer w10: U3.18@2338.39,2540 2515,2540 2550,2575 R58.1@2550,2625
NetR59_1: R59.1 U3.13 | length 431.4
  Top Layer w10: U3.13 2566.58,2441.58 2600,2475 2600,2615 R59.1@2600,2625
NetR60_1: R60.1 U3.12 | length 523.1
  Top Layer w10: U3.12 2587.05,2412.05 2650,2475 2650,2615 R60.1@2650,2625
NetR61_1: R61.1 U4.19 | length 391.6
  Top Layer w10: 2667.56,2267.56 2750,2350 R61.1@2750,2625
NetR62_1: R62.1 U4.18 | length 430.6
  Top Layer w10: 2690,2240 2800,2350 R62.1@2800,2625
NetR63_1: R63.1 U4.13 | length 563
  Top Layer w10: 2681.73,2131.73 2850,2300 R63.1@2850,2625
NetR64_1: R64.1 U4.12 | length 601.9
  Top Layer w10: 2704.17,2104.17 2900,2300 R64.1@2900,2625
NetR65_1: R65.1 U7.54 | length 347.3
  Top Layer w10: 2335,3850 2400,3850 2425,3825 2425,3750 2481.5,3693.5 U7.54
NetR66_2: R66.2 R67.1 U8.3
OUTPUT_CH1+: OutCon1.A4 U7.34 | length 748
  Top Layer w10: U7.34 2880.59,3850 3175.28,4144.69 OutCon1.A4
OUTPUT_CH1-: OutCon1.A5 U7.33 | length 767.1
  Top Layer w10: U7.33 3171.54,4094.68 OutCon1.A5
OUTPUT_CH2+: OutCon1.A6 U7.32 | length 652.9
  Top Layer w10: U7.32 3184.53,4044.68 OutCon1.A6
OUTPUT_CH2-: OutCon1.A7 U7.31 | length 715.4
  Top Layer w10: U7.31 2977.87,3772.24 3200.32,3994.68 OutCon1.A7
OUTPUT_CH3+: OutCon1.A8 U7.30 | length 627.8
  Top Layer w10: U7.30 3008.19,3752.56 3200.32,3944.68 OutCon1.A8
OUTPUT_CH3-: OutCon1.A9 U7.29 | length 690.3
  Top Layer w10: U7.29 3038.5,3732.87 3200.32,3894.68 OutCon1.A9
OUTPUT_CH4+: OutCon1.A10 U7.28 | length 602.7
  Top Layer w10: U7.28 3068.19,3713.19 3199.68,3844.68 OutCon1.A10
OUTPUT_CH4-: OutCon1.A11 U7.27 | length 665.1
  Top Layer w10: U7.27 3099.13,3693.5 3200.32,3794.68 OutCon1.A11
OUTPUT_CH5+: OutCon1.A12 U7.22 | length 610.2
  Top Layer w10: U7.22 3050.71,3595.08 3200.32,3744.68 OutCon1.A12
OUTPUT_CH5-: OutCon1.A13 U7.21 | length 672.6
  Top Layer w10: U7.21 3081.02,3575.39 3200.32,3694.68 OutCon1.A13
OUTPUT_CH6+: OutCon1.A14 U7.20 | length 585.1
  Top Layer w10: U7.20 3111.34,3555.71 3200.32,3644.68 OutCon1.A14
OUTPUT_CH6-: OutCon1.A15 U7.19 | length 647.5
  Top Layer w10: U7.19 3141.65,3536.02 3200.32,3594.68 OutCon1.A15
OUTPUT_CH7+: OutCon1.A16 U7.18 | length 560
  Top Layer w10: U7.18 3171.97,3516.34 3200.32,3544.68 OutCon1.A16
OUTPUT_CH7-: OutCon1.A17 U7.17 | length 624
  Top Layer w10: U7.17 3198.35,3496.65 3200.32,3494.68 OutCon1.A17
OUTPUT_CH8+: OutCon1.A18 U7.16 | length 588.2
  Top Layer w10: U7.16 3179.84,3465.16 3200.32,3444.68 OutCon1.A18
OUTPUT_CH8-: OutCon1.A19 U7.15 | length 718.7
  Top Layer w10: U7.15 2880.59,3439.41 2925.32,3394.68 OutCon1.A19
SCLK: OutCon1.A3 U7.38 | length 955.8
  Top Layer w10: U7.38 2801.85,3906.85 3089.68,4194.69 OutCon1.A3
SDIO/ODM: OutCon1.A2 U7.39 | length 930.2
  Top Layer w10: U7.39 2782.16,3922.16 3104.68,4244.69 OutCon1.A2
UDIFF_CH1+: C22.2 R26.2 U7.43 | length 781.7
  Top Layer w10: U7.43 2703.43,3928.43 2900,4125 2900,4418.86 ; v1(2900,4361.42) 2900,4408.86
  Bottom Layer w10: v1(2900,4361.42) 2900,4408.86 2900,4418.86
UDIFF_CH1-: C21.1 R25.2 U7.44 | length 769.2
  Top Layer w10: U7.44 2683.74,3943.58 2850,4109.84 2850,4418.86 ; v1(2850,4361.42) 2850,4408.86
  Bottom Layer w10: v1(2850,4361.42) 2850,4408.86 2850,4418.86
UDIFF_CH2+: C24.2 R28.2 U7.47 | length 767.9
  Top Layer w10: U7.47 2624.68,4024.68 v1(2775,4175) ; v1(2800,4361.42) 2800,4408.86 2800,4418.86
  Bottom Layer w10: v1(2775,4175) 2800,4200 2800,4418.86 ; v1(2800,4361.42) 2800,4366.42 2800,4403.86
UDIFF_CH2-: C23.1 R27.2 U7.46 | length 752.9
  Top Layer w10: U7.46 2644.37,4002.64 v1(2766.73,4125) ; v1(2750,4361.42) 2750,4408.86 2750,4418.86
  Bottom Layer w10: v1(2750,4361.42) 2750,4366.42 2750,4403.86 ; 2750,4418.86 2750,4141.73 v1(2766.73,4125)
UDIFF_CH3+: C26.2 R30.2 U7.49 | length 852.7
  Top Layer w10: C26.2@1815,2525 v1@1860,2525 ; U7.49 2558.07,3791.93 2525,3825 2525,4000 2650,4125 2650,4418.86 ; v1(2650,4361.42) 2650,4366.42 2650,4403.86
  Bottom Layer w10: v1(2650,4361.42) 2650,4408.86 2650,4418.86
  other v1: 1850,2525
UDIFF_CH3-: C25.1 R29.2 U7.50 | length 833.4
  Top Layer w10: U7.50 2547.76,3772.24 2500,3820 2500,4025 2600,4125 2600,4418.86 ; v1(2600,4361.42) 2600,4366.42 2600,4403.86
  Bottom Layer w10: v1(2600,4361.42) 2600,4408.86 2600,4418.86
UDIFF_CH4+: C28.2 R32.2 U7.53 | length 943.1
  Top Layer w10: v1(2525,4175) 2450,4100 2450,3760 2496.81,3713.19 U7.53 ; v1(2550,4361.42) 2550,4408.86 2550,4418.86
  Bottom Layer w10: v1(2525,4175) 2550,4200 2550,4418.86 ; v1(2550,4361.42) 2550,4366.42 2550,4403.86
UDIFF_CH4-: C27.1 R31.2 U7.52 | length 896.6
  Top Layer w10: v1(2500,4361.42) 2500,4408.86 2500,4418.86 ; v1(2525,4125) 2475,4075 2475,3765 2507.13,3732.87 U7.52
  Bottom Layer w10: v1(2500,4361.42) 2500,4366.42 2500,4403.86 ; 2500,4418.86 2500,4150 v1(2525,4125)
UDIFF_CH5+: C50.2 R58.2 U7.60 | length 1039.2
  Top Layer w10: 2500,2713.58 2500,2715 v1(2500,2753.03) 2500,3100 2450,3150 2450,3550 2475.39,3575.39 U7.60
  Bottom Layer w10: 2500,2705 2500,2715 v1(2500,2753.03)
UDIFF_CH5-: C49.1 R57.2 U7.61 | length 1010.5
  Top Layer w10: 2550,2713.58 2550,2715 v1(2550,2753.03) 2550,3100 2475,3175 2475,3540 2490.71,3555.71 U7.61
  Bottom Layer w10: 2550,2705 2550,2715 v1(2550,2753.03)
UDIFF_CH6+: C52.2 R60.2 U7.64 | length 907
  Top Layer w10: U7.64 2558.07,3496.65 2525,3463.58 2525,3263.58 v1(2625,3163.58) ; 2600,2705 2600,2715 v1(2600,2753.03)
  Bottom Layer w10: 2600,2718.58 v1(2600,2753.03) 2600,3138.58 v1(2625,3163.58)
UDIFF_CH6-: C51.1 R59.2 U7.63 | length 957.2
  Top Layer w10: U7.63 2541.34,3516.34 2500,3475 2500,3238.58 v1(2625,3113.58) ; 2650,2705 2650,2715 v1(2650,2753.03)
  Bottom Layer w10: v1(2625,3113.58) 2650,3088.58 v1(2650,2753.03) 2650,2718.58
UDIFF_CH7+: C54.2 R62.2 U7.2 | length 851.5
  Top Layer w10: U7.2 2624.68,3225.32 2750,3100 v1(2750,2753.03) 2750,2715 2750,2713.58
  Bottom Layer w10: 2750,2705 2750,2715 v1(2750,2753.03)
UDIFF_CH7-: C53.1 R61.2 U7.3 | length 864.1
  Top Layer w10: U7.3 2644.37,3255.63 2800,3100 v1(2800,2753.03) 2800,2715 2800,2713.58
  Bottom Layer w10: 2800,2705 2800,2715 v1(2800,2753.03)
UDIFF_CH8+: C56.2 R64.2 U7.6 | length 876
  Top Layer w10: U7.6 2703.43,3396.57 2875,3225 v1(2875,3163.58) ; 2850,2705 2850,2715 v1(2850,2753.03)
  Bottom Layer w10: 2850,2718.58 v1(2850,2753.03) 2850,3138.58 v1(2875,3163.58)
UDIFF_CH8-: C55.1 R63.2 U7.5 | length 884.2
  Top Layer w10: U7.5 2683.74,3366.26 2800,3250 2800,3188.58 v1(2875,3113.58) ; 2900,2705 2900,2715 v1(2900,2753.03)
  Bottom Layer w10: v1(2875,3113.58) 2900,3088.58 v1(2900,2753.03) 2900,2718.58
VCM: C1.2 C2.2 C3.2 C4.2 C5.2 C6.2 C7.2 C8.2 C17.1 C18.1 C19.1 C20.1 C29.2 C30.2 C31.2 C32.2 C33.2 C34.2 C35.2 C36.2 C45.1 C46.1 C47.1 C48.1 R2.2 R4.2 R6.2 R8.2 R34.2 R36.2 R38.2 R40.2 U1.11 U1.17 U2.11 U2.17 U3.11 U3.17 U4.11 U4.17
VOFFSET: OutCon1.A25 OutCon1.A26 | length 9366.1
  Top Layer w10: 2283.27,2412.05 2283.27,2366.73 v1(2300,2350) ; 2289.17,4538.03 2289.17,4494.69 v1(2300,4483.86) ; 2289.17,4838.03 2289.17,4794.69 v1(2300,4783.86) ; 2338.39,2518.35 2381.65,2518.35 v1(2400,2500) ; 2338.39,4652.2 2381.65,4652.2 v1(2400,4633.86) ; 2338.39,4952.2 2381.65,4952.2 v1(2400,4933.86)
  Mid-Layer 1 w10: v1(2300,2350) v1(2300,2050) 2400,2150 v1(2400,2200) v1(2400,2500) ; 2300,2366.85 v1(2300,4483.86) ; v1(2300,4783.86) v1(2300,4483.86) ; v1(2400,4933.86) v1(2400,4633.86) 2400,4583.86 v1(2300,4483.86)
  Mid-Layer 1 w12: v1(2400,2500) 2925,2500 3469.68,3044.68 OutCon1.A26 3505,3044.68 OutCon1.A25
  Mid-Layer 1 w20: v2(1975,1975) 2225,1975 v1(2300,2050) ; v2(1975,4408.86) 2225,4408.86 v1(2300,4483.86)
  Bottom Layer w20: v2(1975,1975) 1975,2061 1975,2164 1975,2225 1975,2314 1975,2616.85 v2(1975,4408.86) 1975,4494.86 1975,4597.86 1975,4658.86 1975,4719.86 1975,4822.86 1975,4944.86 1975,5033.86 v2(1975,5133.86)
VOFFSET+: C9.2 C11.2 C13.2 C15.2 C37.2 C39.2 C41.2 C43.2 R1.2 R3.2 R5.2 R7.2 R9.2 R11.2 R13.2 R15.2 R33.2 R35.2 R37.2 R39.2 R41.2 R43.2 R45.2 R47.2 R68.2 R69.2 | length 45
  Top Layer w10: C9.2@1815,5033.86 R9.2@1860,5033.86
  other v1: 1850,5033.86
pads on no net: InCon_1.15 InCon_1.16 InCon_1.17 InCon_2.15 InCon_2.16 InCon_2.17 OutCon1.27 OutCon1.28 OutCon1.B2 OutCon1.B5 OutCon1.B7 OutCon1.B9 OutCon1.B11 OutCon1.B13 OutCon1.B15 OutCon1.B17 OutCon1.B19 OutCon1.B20 OutCon1.B21 OutCon1.B22 OutCon1.B24 U1.14 U1.20 U2.14 U2.20 U3.14 U3.20 U4.14 U4.20 U7.23 U7.24 U7.25 U7.26 U8.5 U8.6 U8.7
copper on no net: | length 5194.8
  Top Layer w10: 1815,2075 v1@1860,2075 ; 1815,2150 v1@1860,2150 ; 1815,2225 v1@1860,2225 ; 1815,2300 v1@1860,2300 ; 1815,2375 v1@1860,2375 ; 1815,2450 v1@1860,2450 ; 1815,4508.86 v1@1860,4508.86 ; 1815,4583.86 v1@1860,4583.86 ; 1815,4658.86 v1@1860,4658.86 ; 1815,4733.86 v1@1860,4733.86 ; 1960,2525 2050,2525 2070,2545 2170,2545 2175,2540 ; 1960,4583.86 2041,4583.86 2045,4579.86 ; 1960,4733.86 2045,4733.86 2050,4738.86 ; 1960,4883.86 2041,4883.86 2045,4879.86 ; 2050,4583.86 2075,4558.86 2168.27,4558.86 2175,4565.59 ; 2050,4733.86 2082.44,4701.42 2202.56,4701.42 ; 2050,4883.86 2075,4858.86 2168.27,4858.86 2175,4865.59 ; 2135,4503.86 2220,4503.86 2224.21,4508.07 2224.21,4538.03 ; 2135,4593.86 2141.61,4587.24 2175,4587.24 ; 2135,4643.86 2143.35,4652.2 2175,4652.2 ; 2135,4893.86 2141.61,4887.24 2175,4887.24 ; 2135.5,2459.5 2135,2460 2136.26,2461.26 2175,2461.26 ; 2140,2605 2215,2605 2224.21,2595.79 2224.21,2567.56 ; 2140,4738.86 2215,4738.86 2224.21,4729.65 2224.21,4701.42 ; 2140,4803.86 2220,4803.86 2224.21,4808.07 2224.21,4838.03 ; 2175,3590 2225,3590 2270,3635 2505,3635 2525.24,3614.76 2573.5,3614.76 ; 2175,3670 2190,3655 2520,3655 2540.55,3634.45 2573.5,3634.45 ; 2310.83,4701.42 2582.44,4701.42 2650,4633.86 2650,4508.86 ; 2338.39,4565.59 2543.27,4565.59 2550,4558.86 2550,4508.86 ; 2338.39,4865.59 2693.27,4865.59 2800,4758.86 2800,4508.86 ; 2380,3775 2380,3761 2380,3745 2335,3700 2360,3675 2530,3675 2550.87,3654.13 2573.5,3654.13
  Top Layer w20: 2050,3475 2165,3475 2175,3475 2175,3489 2175,3580 2175,3590 ; 2050,3775 2165,3775 2175,3775 2175,3761 2175,3680 2175,3670
  other v1: 1850,2075 1850,2150 1850,2225 1850,2300 1850,2375 1850,2450 1850,4508.86 1850,4583.86 1850,4658.86 1850,4733.86

## Polygon pours and split planes (outlines as drawn)
GND on Mid-Layer 1 "GND" (hatched 90Degree grid 7.87 track 11.81, remove dead copper, pour order 7): 1050,5577.56 3805.91,5577.56 3805.91,1050 1050,1050
GND on Mid-Layer 2 "GND" (hatched 90Degree grid 7.87 track 11.81, remove dead copper, pour order 6): 1050,5577.56 3805.91,5577.56 3805.91,1050 1050,1050

## Keep-outs
Keep-Out Layer:
  lines w20: 1050,1640.55 3805.91,1640.55 3805.91,5577.56 1050,5577.56 1050,1640.55

## Silkscreen, mask and mechanical layers (free items; w line width, h text height)
Top Solder:
  lines w10: 1050,1050 3805.91,1050 3805.91,6168.11 1050,6168.11 1050,1050
Bottom Solder:
  lines w10: 1050,1050 1050,6168.11 3805.91,6168.11 3805.91,1050 1050,1050

## Text inside footprints (layer, text, board x,y; h text height)
C1: Mechanical 3 "CHIP0603" at 2080,4993.86 h20
C2: Mechanical 3 "CHIP0603" at 2080,4918.86 h20
C3: Mechanical 3 "CHIP0603" at 2080,4843.86 h20
C4: Mechanical 3 "CHIP0603" at 2080,4768.86 h20
C5: Mechanical 3 "CHIP0603" at 2080,4693.86 h20
C6: Mechanical 3 "CHIP0603" at 2080,4618.86 h20
C7: Mechanical 3 "CHIP0603" at 2080,4543.86 h20
C8: Mechanical 3 "CHIP0603" at 2080,4468.86 h20
C9: Mechanical 3 "CHIP0603" at 1725,4993.86 h20
C10: Mechanical 3 "CHIP0603" at 1725,4918.86 h20
C11: Mechanical 3 "CHIP0603" at 2080,2410 h20
C12: Mechanical 3 "CHIP0603" at 2080,2335 h20
C13: Mechanical 3 "CHIP0603" at 2080,2260 h20
C14: Mechanical 3 "CHIP0603" at 2080,2185 h20
C15: Mechanical 3 "CHIP0603" at 2080,2110 h20
C16: Mechanical 3 "CHIP0603" at 2080,2035 h20
C17: Mechanical 3 "CHIP0603" at 1212,-398.78 h20 r90
C18: Mechanical 3 "CHIP0603" at 1390.39,448.82 h20 r90
C19: Mechanical 3 "CHIP0603" at 1725,4843.86 h20
C20: Mechanical 3 "CHIP0603" at 1725,4768.86 h20
C21: Mechanical 3 "CHIP0603" at 2860,4418.86 h20 r270
C22: Mechanical 3 "CHIP0603" at 2890,4498.86 h20 r90
C23: Mechanical 3 "CHIP0603" at 1725,4543.86 h20
C24: Mechanical 3 "CHIP0603" at 1725,4468.86 h20
C25: Mechanical 3 "CHIP0603" at 1725,2560 h20
C26: Mechanical 3 "CHIP0603" at 1725,2485 h20
C27: Mechanical 3 "CHIP0603" at 1725,2410 h20
C28: Mechanical 3 "CHIP0603" at 1725,2335 h20
C29: Mechanical 3 "CHIP0603" at 1725,2260 h20
C30: Mechanical 3 "CHIP0603" at 1725,2185 h20
C31: Mechanical 3 "CHIP0603" at 1725,2110 h20
C32: Mechanical 3 "CHIP0603" at 1725,2035 h20
C33: Mechanical 3 "CHIP0603" at 1212,787.4 h20 r90
C34: Mechanical 3 "CHIP0603" at 2449.45,649.61 h20 r90
C35: Mechanical 3 "CHIP0603" at 2760,4418.86 h20 r270
C36: Mechanical 3 "CHIP0603" at 2790,4498.86 h20 r90
C37: Mechanical 3 "CHIP0603" at 2610,4418.86 h20 r270
C38: Mechanical 3 "CHIP0603" at 2640,4498.86 h20 r90
C39: Mechanical 3 "CHIP0603" at 2510,4418.86 h20 r270
C40: Mechanical 3 "CHIP0603" at 2540,4498.86 h20 r90
C41: Mechanical 3 "CHIP0603" at 2540,2705 h20 r90
C42: Mechanical 3 "CHIP0603" at 2510,2625 h20 r270
C43: Mechanical 3 "CHIP0603" at 2640,2705 h20 r90
C44: Mechanical 3 "CHIP0603" at 2610,2625 h20 r270
C45: Mechanical 3 "CHIP0603" at 2790,2705 h20 r90
C46: Mechanical 3 "CHIP0603" at 2760,2625 h20 r270
C47: Mechanical 3 "CHIP0603" at 2890,2705 h20 r90
C48: Mechanical 3 "CHIP0603" at 2860,2625 h20 r270
C49: Mechanical 3 "CHIP0603" at 2225,3240 h20 r90
C50: Mechanical 3 "CHIP0603" at 2085,3815 h20
C51: Mechanical 3 "CHIP0603" at 1800,3375 h20 r270
C52: Mechanical 3 "CHIP0603" at 2360,3420 h20 r180
C53: Mechanical 3 "CHIP0603" at 2220,3875 h20
C54: Mechanical 3 "CHIP0603" at 2295,3220 h20
C55: Mechanical 3 "CHIP0603" at 2295,4888.86 h20 r90
C56: Mechanical 3 "CHIP0603" at 2295,4588.86 h20 r90
C57: Mechanical 3 "CEL-SMD300" at 2130,3555 h20 r90
C58: Mechanical 3 "CHIP0603" at 1212,624.9 h20 r90
C59: Mechanical 3 "CHIP0603" at 1300,624.9 h20 r90
C60: Mechanical 3 "CHIP0603" at 1332,1072.9 h20 r90
C61: Mechanical 3 "CHIP0603" at 1124,624.9 h20 r90
C62: Mechanical 3 "CHIP0603" at 1124,237 h20 r90
C63: Mechanical 3 "CHIP0603" at 1212,237 h20 r90
C64: Mechanical 3 "CHIP0603" at 1300,430.95 h20 r90
C65: Mechanical 3 "CHIP0603" at 2295,2458.15 h20 r90
C66: Mechanical 3 "CHIP0603" at 2295,2158.15 h20 r90
C67: Mechanical 3 "CHIP0603" at 2695,3815 h20 r270
C68: Mechanical 3 "CHIP0603" at 2535,3815 h20 r270
C69: Mechanical 3 "CHIP0603" at 2850,3490 h20 r90
C70: Mechanical 3 "CHIP0603" at 2600,3565 h20
C71: Mechanical 3 "CHIP0603" at 2590.55,3347.09 h20 r180
C72: Mechanical 3 "CHIP0603" at 3000,3610 h20
C73: Mechanical 3 "CHIP0805" at 1425.2,1044.49 h20
InCon_1: Mechanical 3 "5" at 1587.74,5155.88 h60 r90; Mechanical 3 "1" at 1593.49,4482.59 h60 r90; Mechanical 3 "10" at 1493.49,5124.07 h60 r90; Mechanical 3 "6" at 1493.49,4450.35 h60 r90; Mechanical 3 "15" at 1393.49,5124.07 h60 r90; Mechanical 3 "11" at 1393.49,4450.35 h60 r90; Mechanical 3 "DHR-F-15" at 953.41,4563.23 h60 r90; Top Overlay "DHR-F-15" at 953.41,4563.23 h60 r90; Top Overlay "1" at 1593.49,4482.59 h60 r90; Top Overlay "6" at 1493.49,4450.35 h60 r90; Top Overlay "11" at 1393.49,4450.35 h60 r90; Top Overlay "5" at 1587.74,5155.88 h60 r90; Top Overlay "10" at 1493.49,5124.07 h60 r90; Top Overlay "15" at 1393.49,5124.07 h60 r90; Mechanical 2 "DHR-F-26" at 1018.99,4404.8 h20 r90
InCon_2: Mechanical 3 "5" at 1587.74,2734.62 h60 r90; Mechanical 3 "1" at 1593.49,2061.33 h60 r90; Mechanical 3 "10" at 1493.49,2702.81 h60 r90; Mechanical 3 "6" at 1493.49,2029.09 h60 r90; Mechanical 3 "15" at 1393.49,2702.81 h60 r90; Mechanical 3 "11" at 1393.49,2029.09 h60 r90; Mechanical 3 "DHR-F-15" at 953.41,2141.97 h60 r90; Top Overlay "DHR-F-15" at 953.41,2141.97 h60 r90; Top Overlay "1" at 1593.49,2061.33 h60 r90; Top Overlay "6" at 1493.49,2029.09 h60 r90; Top Overlay "11" at 1393.49,2029.09 h60 r90; Top Overlay "5" at 1587.74,2734.62 h60 r90; Top Overlay "10" at 1493.49,2702.81 h60 r90; Top Overlay "15" at 1393.49,2702.81 h60 r90; Mechanical 2 "DHR-F-26" at 1018.99,1983.54 h20 r90
OutCon1: Mechanical 3 "FX2-52P-1.27DSL(71)" at 3898.05,4227.91 h60 r270; Top Overlay "FX2-52P-1.27DSL(71)" at 3898.05,4227.91 h60 r270
R1: Mechanical 3 "CHIP0603" at 1950,4993.86 h20
R2: Mechanical 3 "CHIP0603" at 1870,4998.86 h20 r180
R3: Mechanical 3 "CHIP0603" at 1950,4843.86 h20
R4: Mechanical 3 "CHIP0603" at 1870,4848.86 h20 r180
R5: Mechanical 3 "CHIP0603" at 1950,4693.86 h20
R6: Mechanical 3 "CHIP0603" at 1870,4698.86 h20 r180
R7: Mechanical 3 "CHIP0603" at 1950,4543.86 h20
R8: Mechanical 3 "CHIP0603" at 1870,4548.86 h20 r180
R9: Mechanical 3 "CHIP0603" at 1950,5073.86 h20 r180
R10: Mechanical 3 "CHIP0603" at 1950,4998.86 h20 r180
R11: Mechanical 3 "CHIP0603" at 1950,2410 h20
R12: Mechanical 3 "CHIP0603" at 1870,2415 h20 r180
R13: Mechanical 3 "CHIP0603" at 1950,2260 h20
R14: Mechanical 3 "CHIP0603" at 1870,2265 h20 r180
R15: Mechanical 3 "CHIP0603" at 1950,2110 h20
R16: Mechanical 3 "CHIP0603" at 1870,2115 h20 r180
R17: Mechanical 3 "CHIP0603" at 2050,4998.86 h20
R18: Mechanical 3 "CHIP0603" at 2125,4983.86 h20 r180
R19: Mechanical 3 "CHIP0603" at 1950,4923.86 h20 r180
R20: Mechanical 3 "CHIP0603" at 1950,4848.86 h20 r180
R21: Mechanical 3 "CHIP0603" at 1950,4773.86 h20 r180
R22: Mechanical 3 "CHIP0603" at 1950,4698.86 h20 r180
R23: Mechanical 3 "CHIP0603" at 1950,4623.86 h20 r180
R24: Mechanical 3 "CHIP0603" at 1950,4548.86 h20 r180
R25: Mechanical 3 "CHIP0603" at 2860,4498.86 h20 r270
R26: Mechanical 3 "CHIP0603" at 2810,4498.86 h20 r270
R27: Mechanical 3 "CHIP0603" at 1950,2490 h20 r180
R28: Mechanical 3 "CHIP0603" at 1950,2415 h20 r180
R29: Mechanical 3 "CHIP0603" at 1950,2340 h20 r180
R30: Mechanical 3 "CHIP0603" at 1950,2265 h20 r180
R31: Mechanical 3 "CHIP0603" at 1950,2190 h20 r180
R32: Mechanical 3 "CHIP0603" at 1950,2115 h20 r180
R33: Mechanical 3 "CHIP0603" at 1124,866.14 h20 r90
R34: Mechanical 3 "CHIP0603" at 1117.48,523.62 h20 r270
R35: Mechanical 3 "CHIP0603" at 2045,4853.86 h20
R36: Mechanical 3 "CHIP0603" at 2130,4843.86 h20 r180
R37: Mechanical 3 "CHIP0603" at 2050,4698.86 h20
R38: Mechanical 3 "CHIP0603" at 2125,4683.86 h20 r180
R39: Mechanical 3 "CHIP0603" at 2045,4553.86 h20
R40: Mechanical 3 "CHIP0603" at 2125,4543.86 h20 r180
R41: Mechanical 3 "CHIP0603" at 2050,2565 h20
R42: Mechanical 3 "CHIP0603" at 2125,2550 h20 r180
R43: Mechanical 3 "CHIP0603" at 2045,2420 h20
R44: Mechanical 3 "CHIP0603" at 2130,2410 h20 r180
R45: Mechanical 3 "CHIP0603" at 2047.24,2259.21 h20
R46: Mechanical 3 "CHIP0603" at 2125,2250 h20 r180
R47: Mechanical 3 "CHIP0603" at 2045,2120 h20
R48: Mechanical 3 "CHIP0603" at 2125,2110 h20 r180
R49: Mechanical 3 "CHIP0603" at 1300,984.25 h20 r90
R50: Mechanical 3 "CHIP0603" at 1300,590.55 h20 r90
R51: Mechanical 3 "CHIP0603" at 2760,4498.86 h20 r270
R52: Mechanical 3 "CHIP0603" at 2710,4498.86 h20 r270
R53: Mechanical 3 "CHIP0603" at 2610,4498.86 h20 r270
R54: Mechanical 3 "CHIP0603" at 2560,4498.86 h20 r270
R55: Mechanical 3 "CHIP0603" at 2510,4498.86 h20 r270
R56: Mechanical 3 "CHIP0603" at 2460,4498.86 h20 r270
R57: Mechanical 3 "CHIP0603" at 2540,2625 h20 r90
R58: Mechanical 3 "CHIP0603" at 2590,2625 h20 r90
R59: Mechanical 3 "CHIP0603" at 2640,2625 h20 r90
R60: Mechanical 3 "CHIP0603" at 2690,2625 h20 r90
R61: Mechanical 3 "CHIP0603" at 2790,2625 h20 r90
R62: Mechanical 3 "CHIP0603" at 2840,2625 h20 r90
R63: Mechanical 3 "CHIP0603" at 2890,2625 h20 r90
R64: Mechanical 3 "CHIP0603" at 2940,2625 h20 r90
R65: Mechanical 3 "CHIP0603" at 2295,4020 h20 r180
R66: Mechanical 3 "CHIP0805" at 1220,3490 h20 r90
R67: Mechanical 3 "CHIP0805" at 1375,3350 h20 r90
R68: Mechanical 3 "CHIP0805" at 2039.37,1178.35 h20
R69: Mechanical 3 "CHIP0805" at 2484.25,1146.85 h20
R70: Mechanical 3 "CHIP0603" at 1124,430.95 h20 r90
R71: Mechanical 3 "CHIP0603" at 1212,430.95 h20 r90